# Altium PCB DEVEFX000001A.PcbDoc (part 1 of 3)
Units mm, origin at the board's own origin, x right, y up, seen from the top; angles counter-clockwise.
Board outline 90 x 103.5 mm, 6 copper layers (Top Layer, IN1, IN2, IN3, IN4, Bottom Layer), stack 1.072 mm thick; 156 components, 261 nets, 794 pads, 332 vias.
Unrouted connection lines stored in the file: 137.
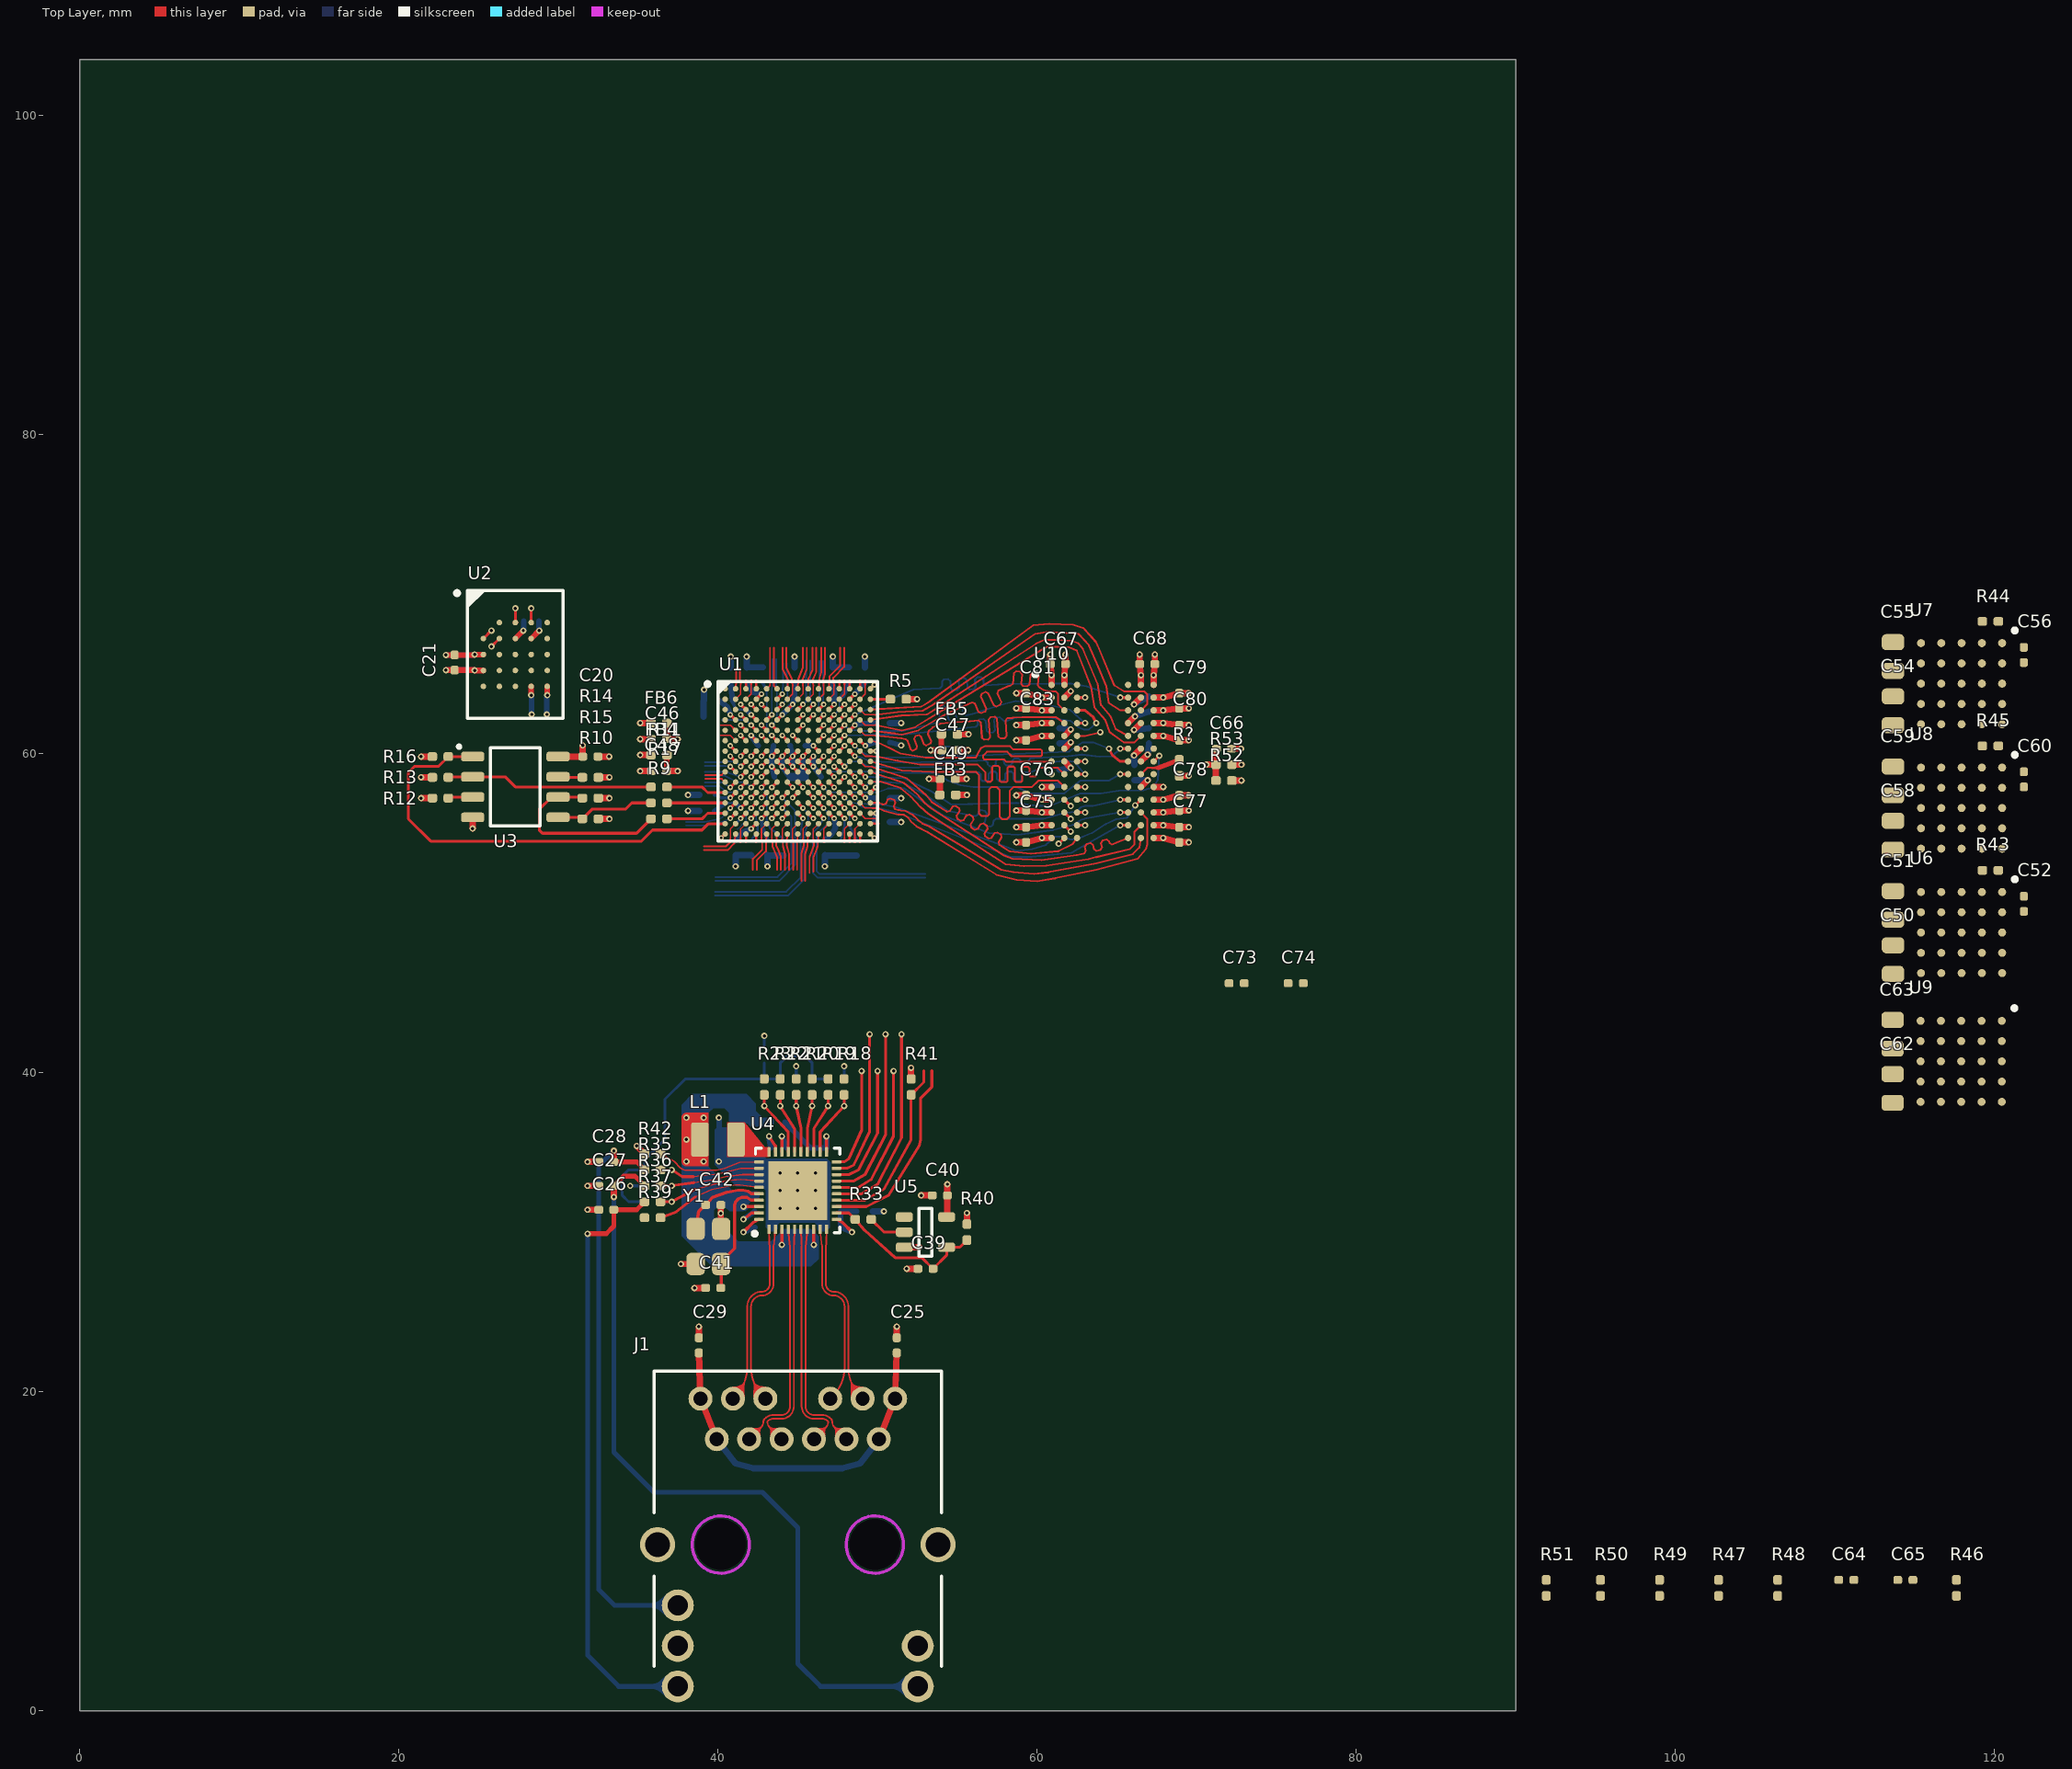
[diagram p0: Top Layer view]
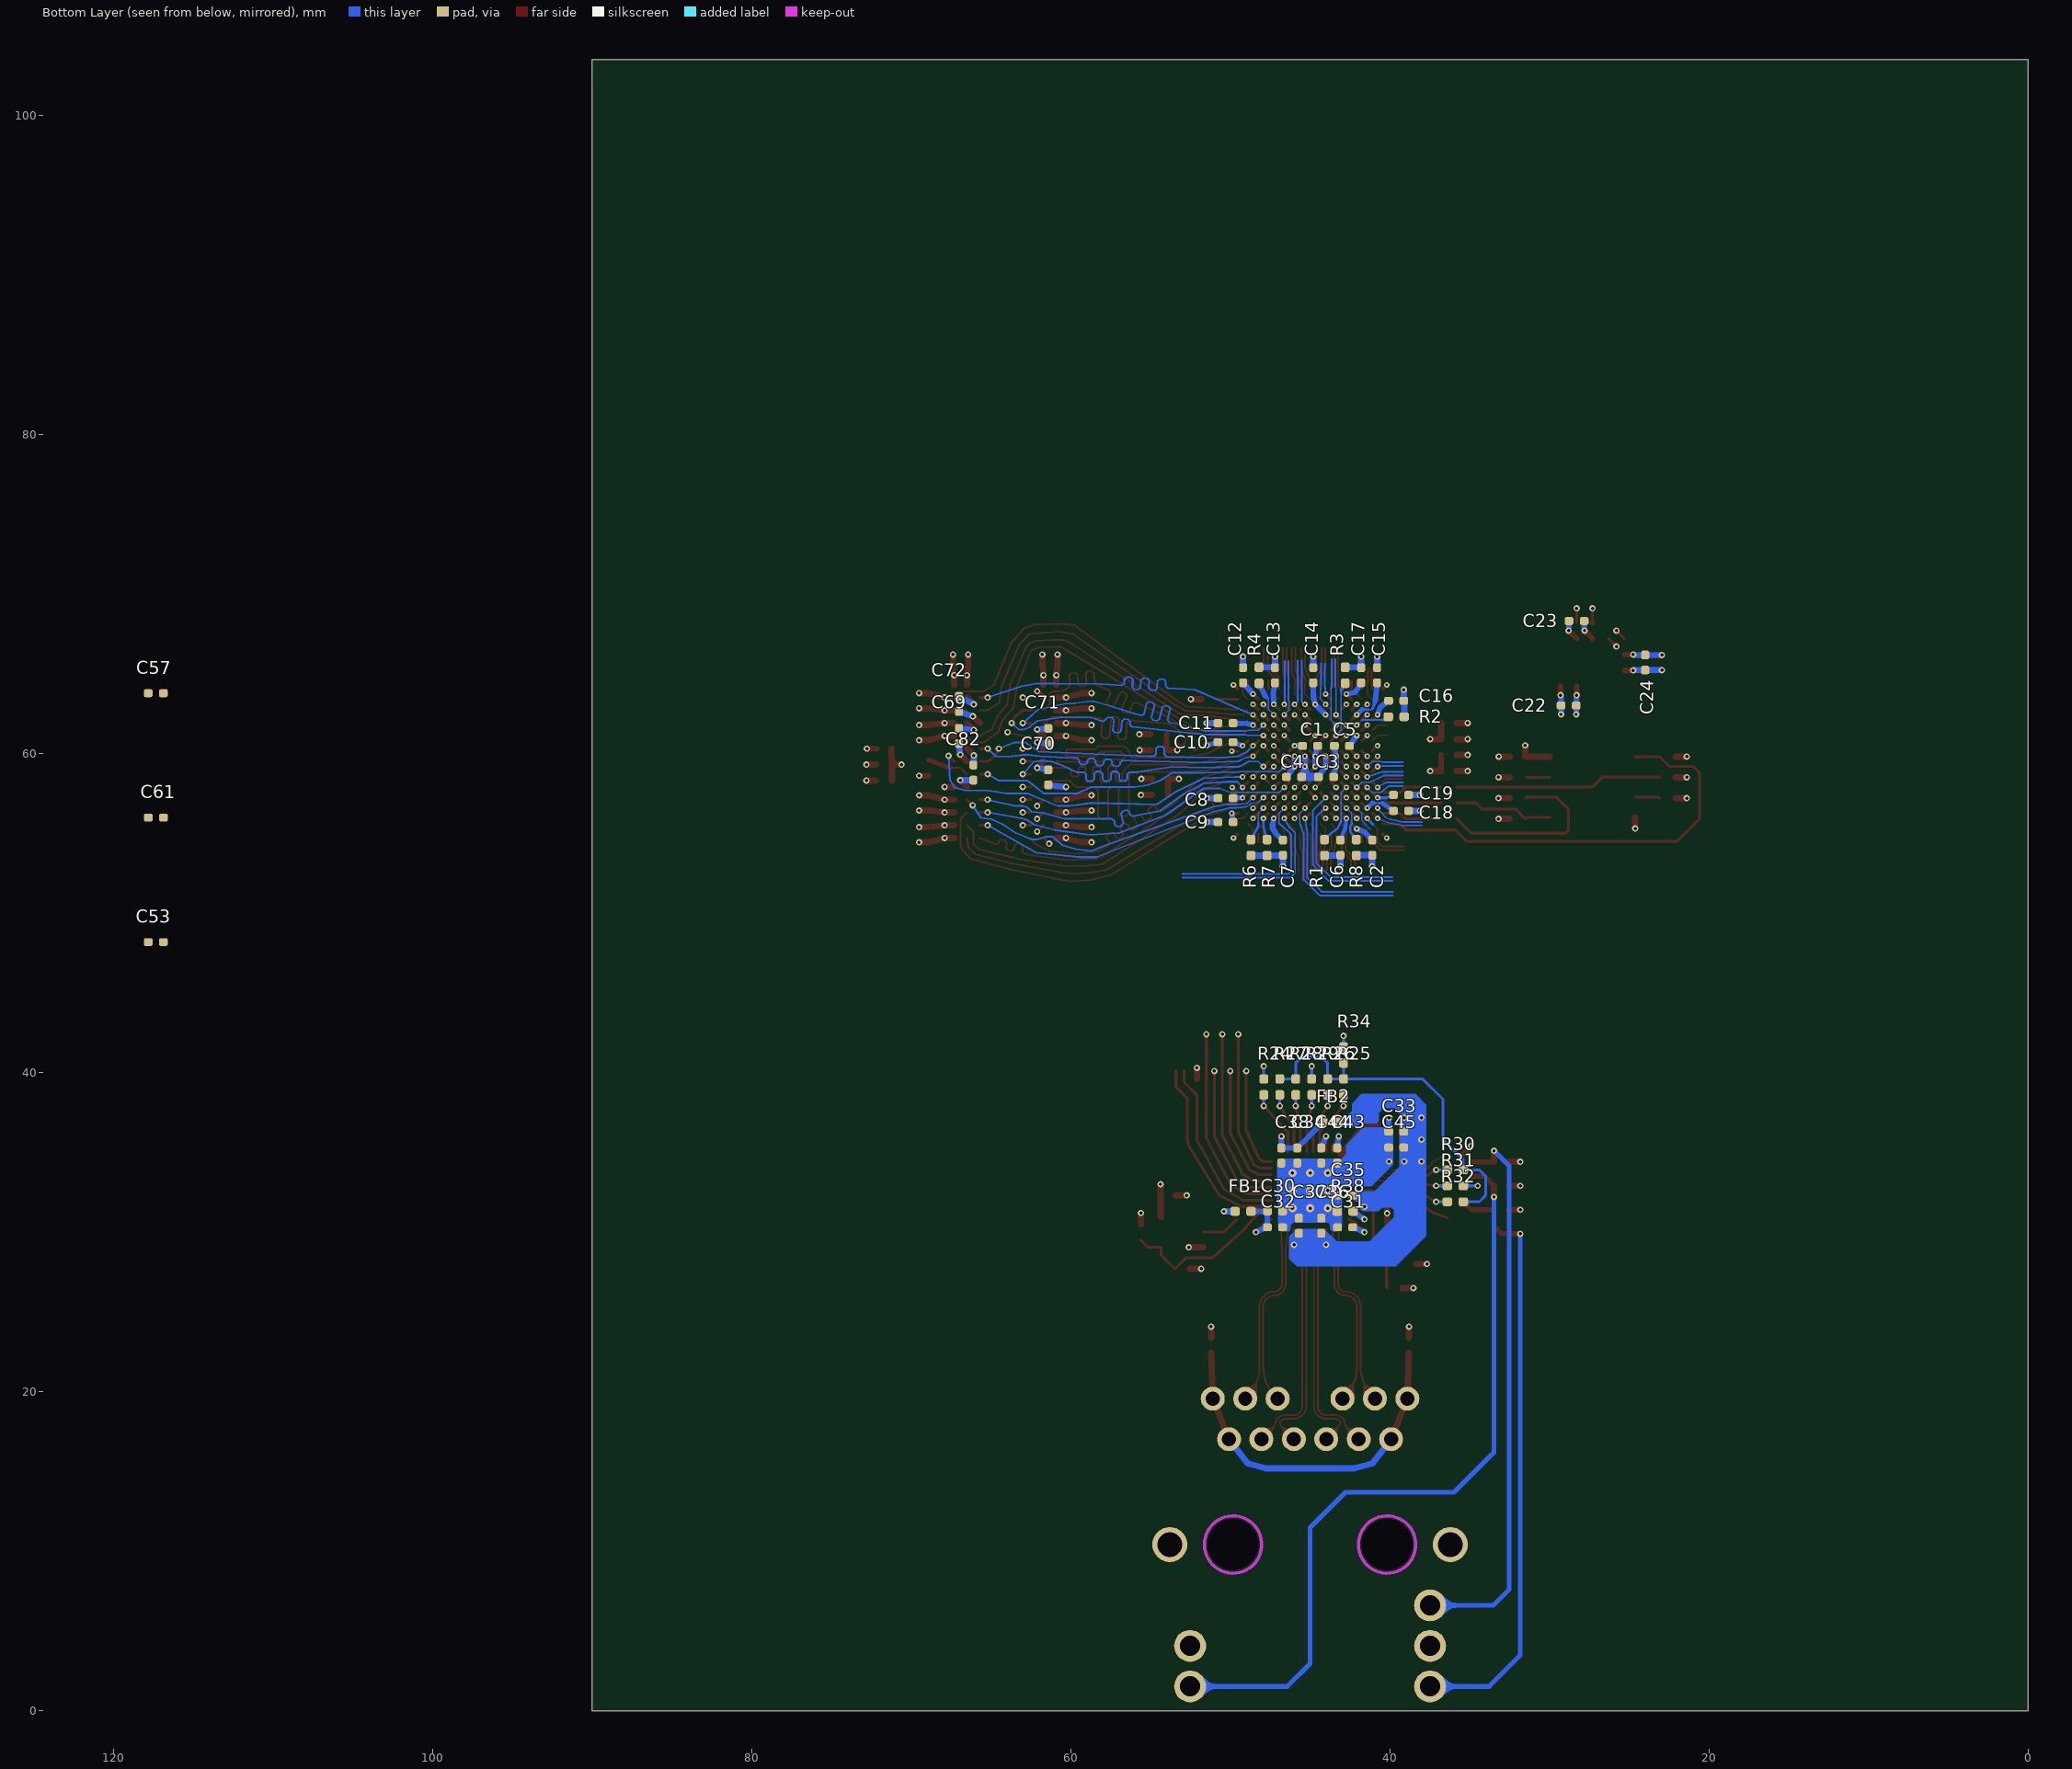
[diagram p1: Bottom Layer view, seen from below]
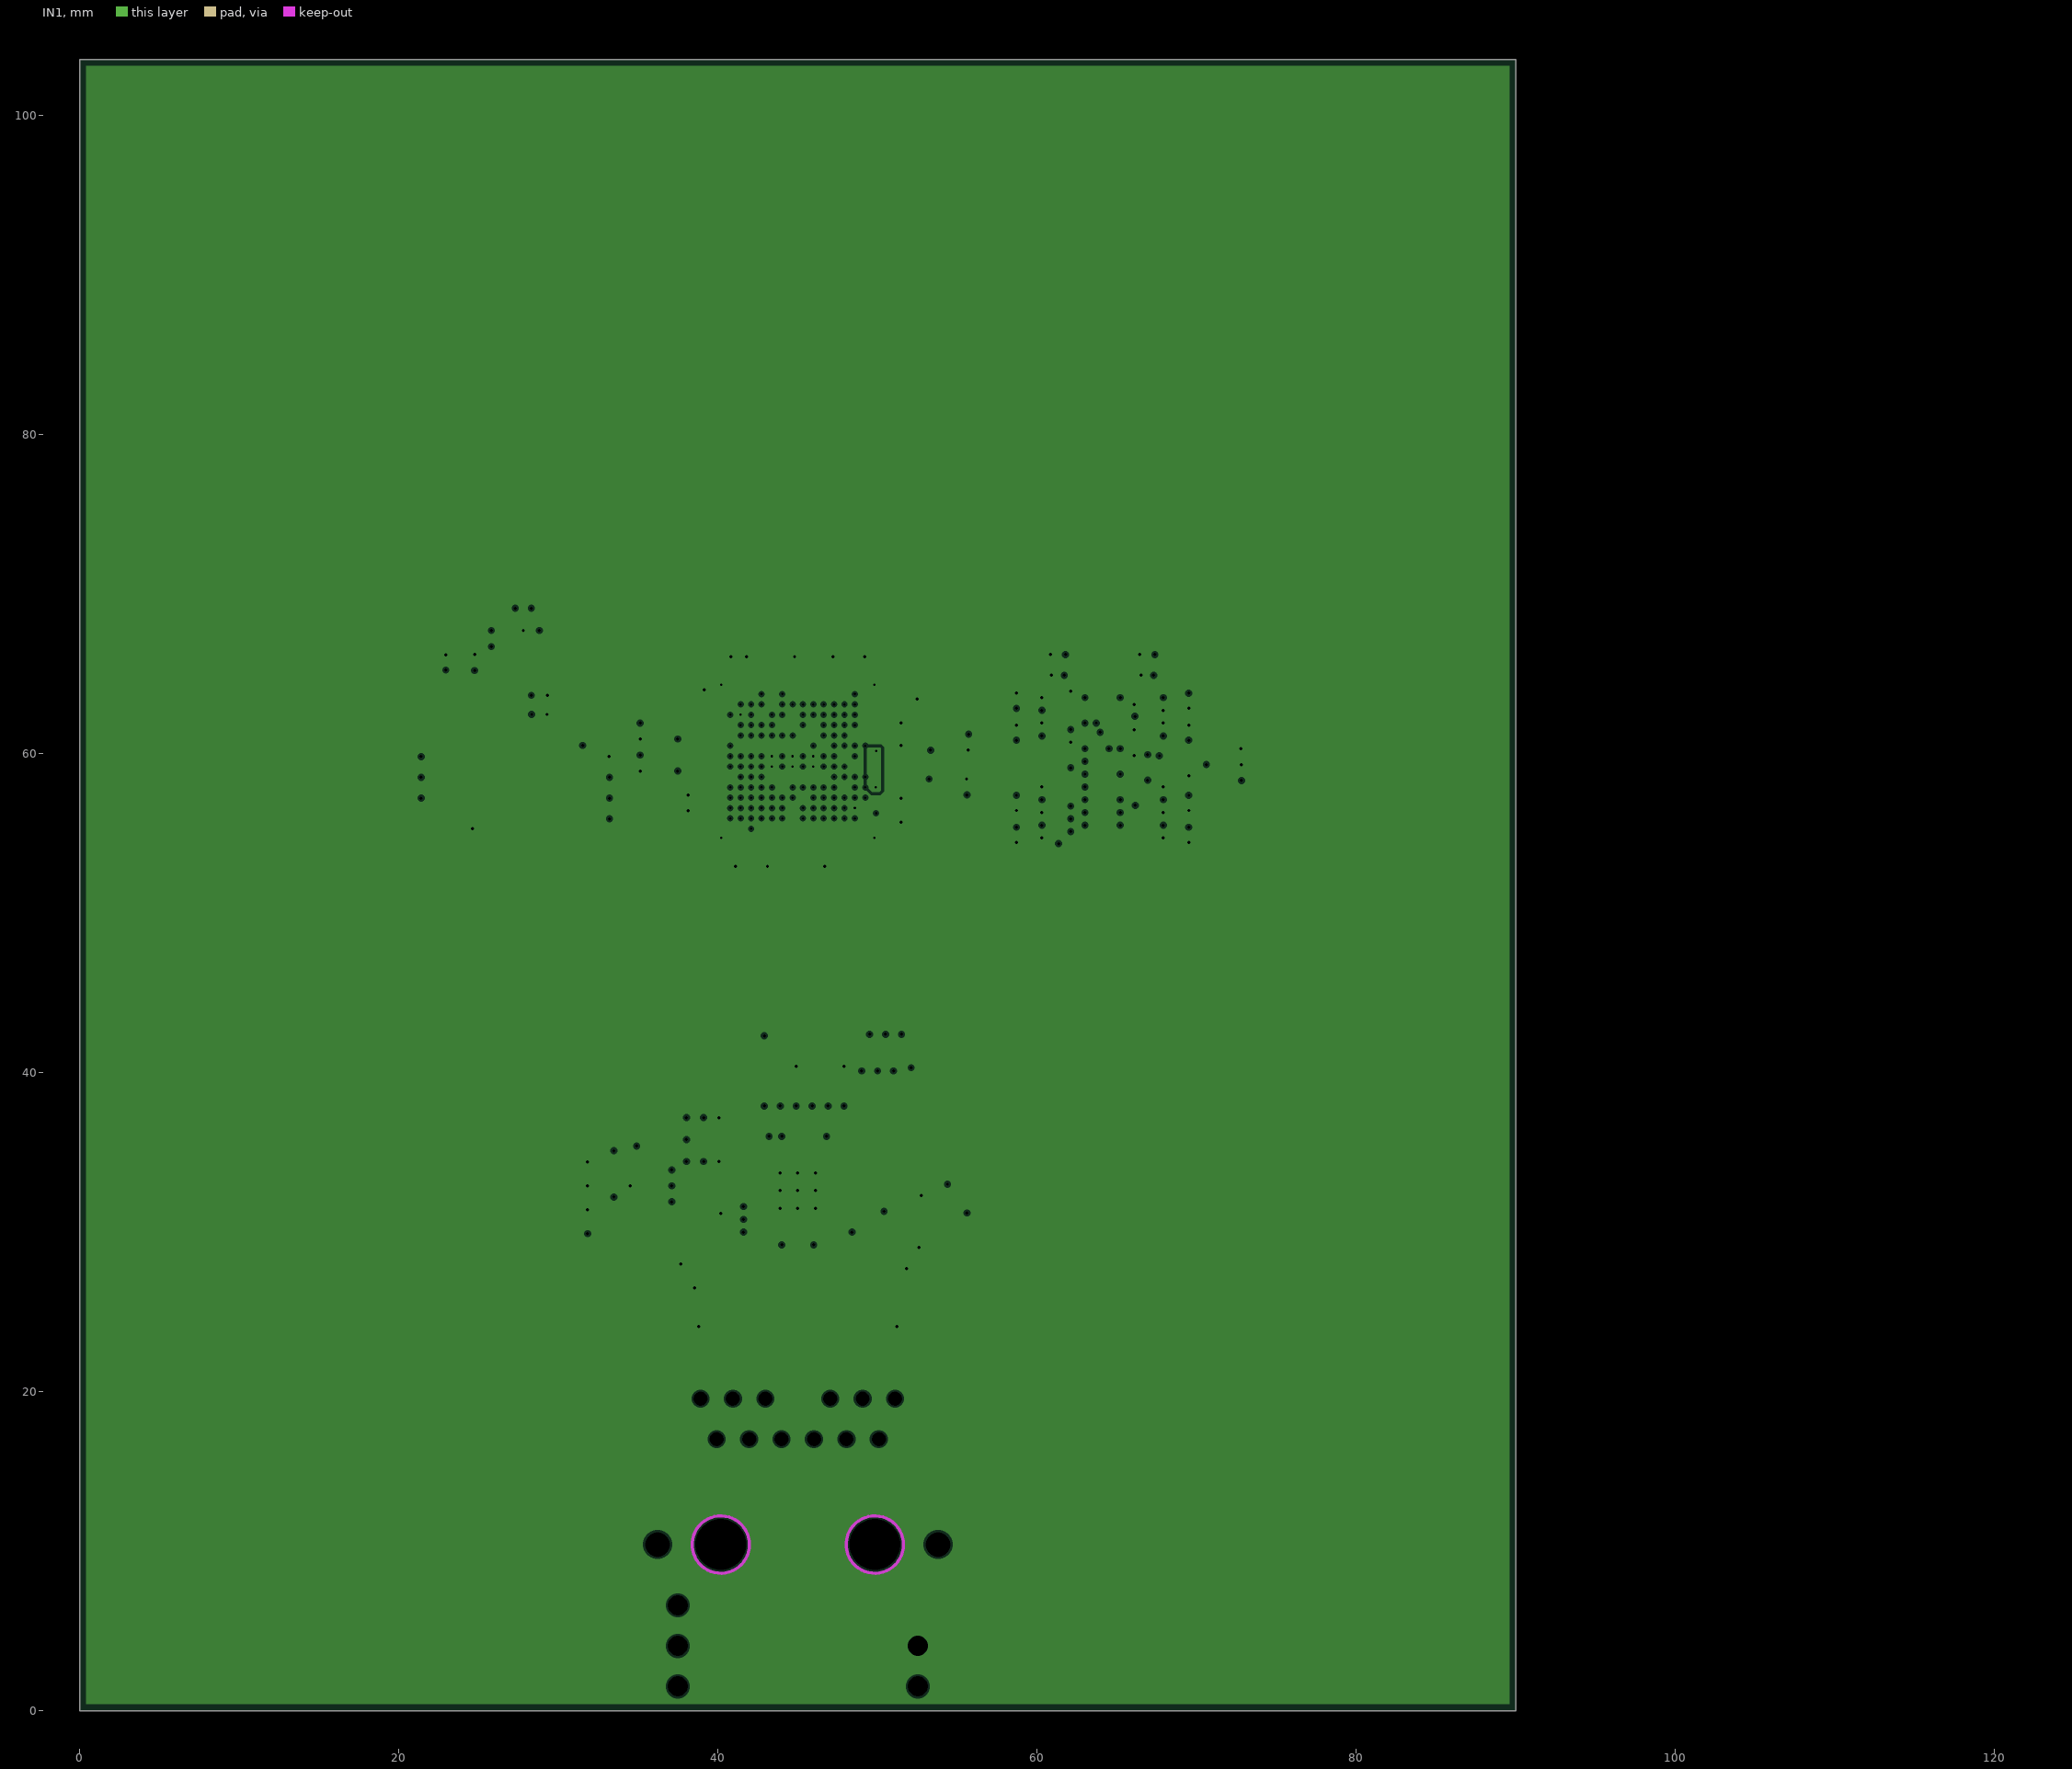
[diagram p2: IN1, clearances drawn from the general rule]
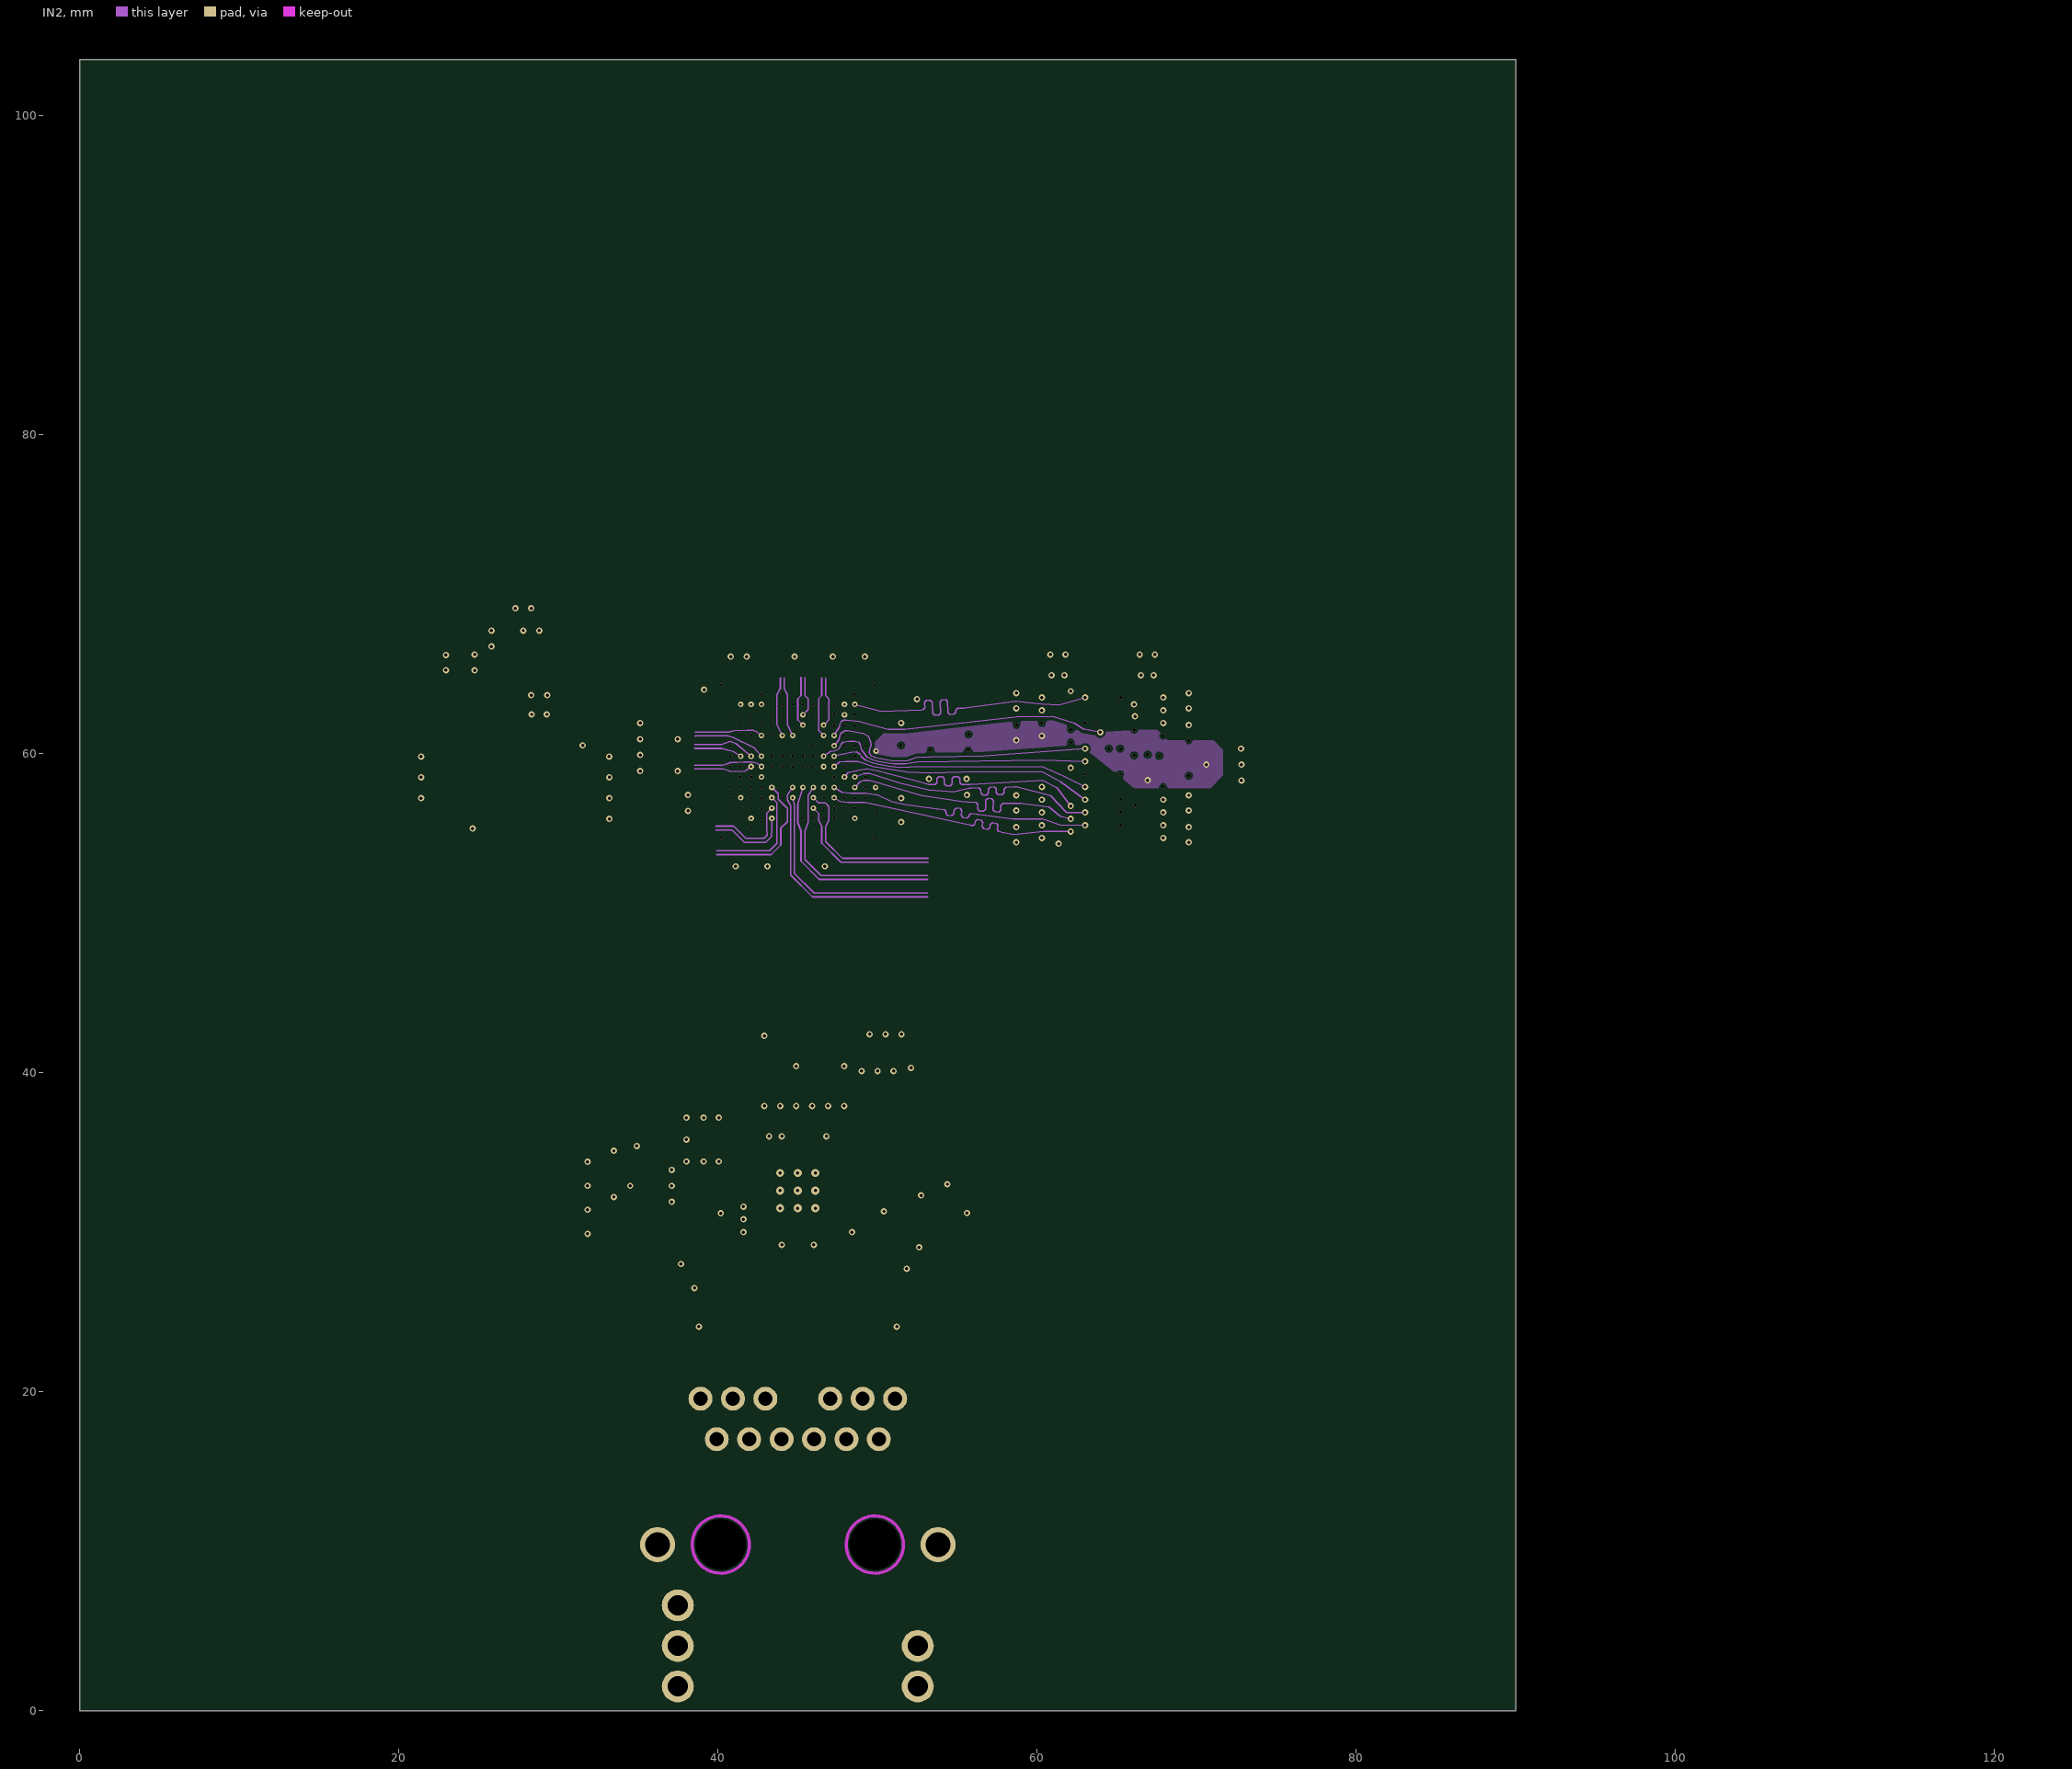
[diagram p3: IN2]
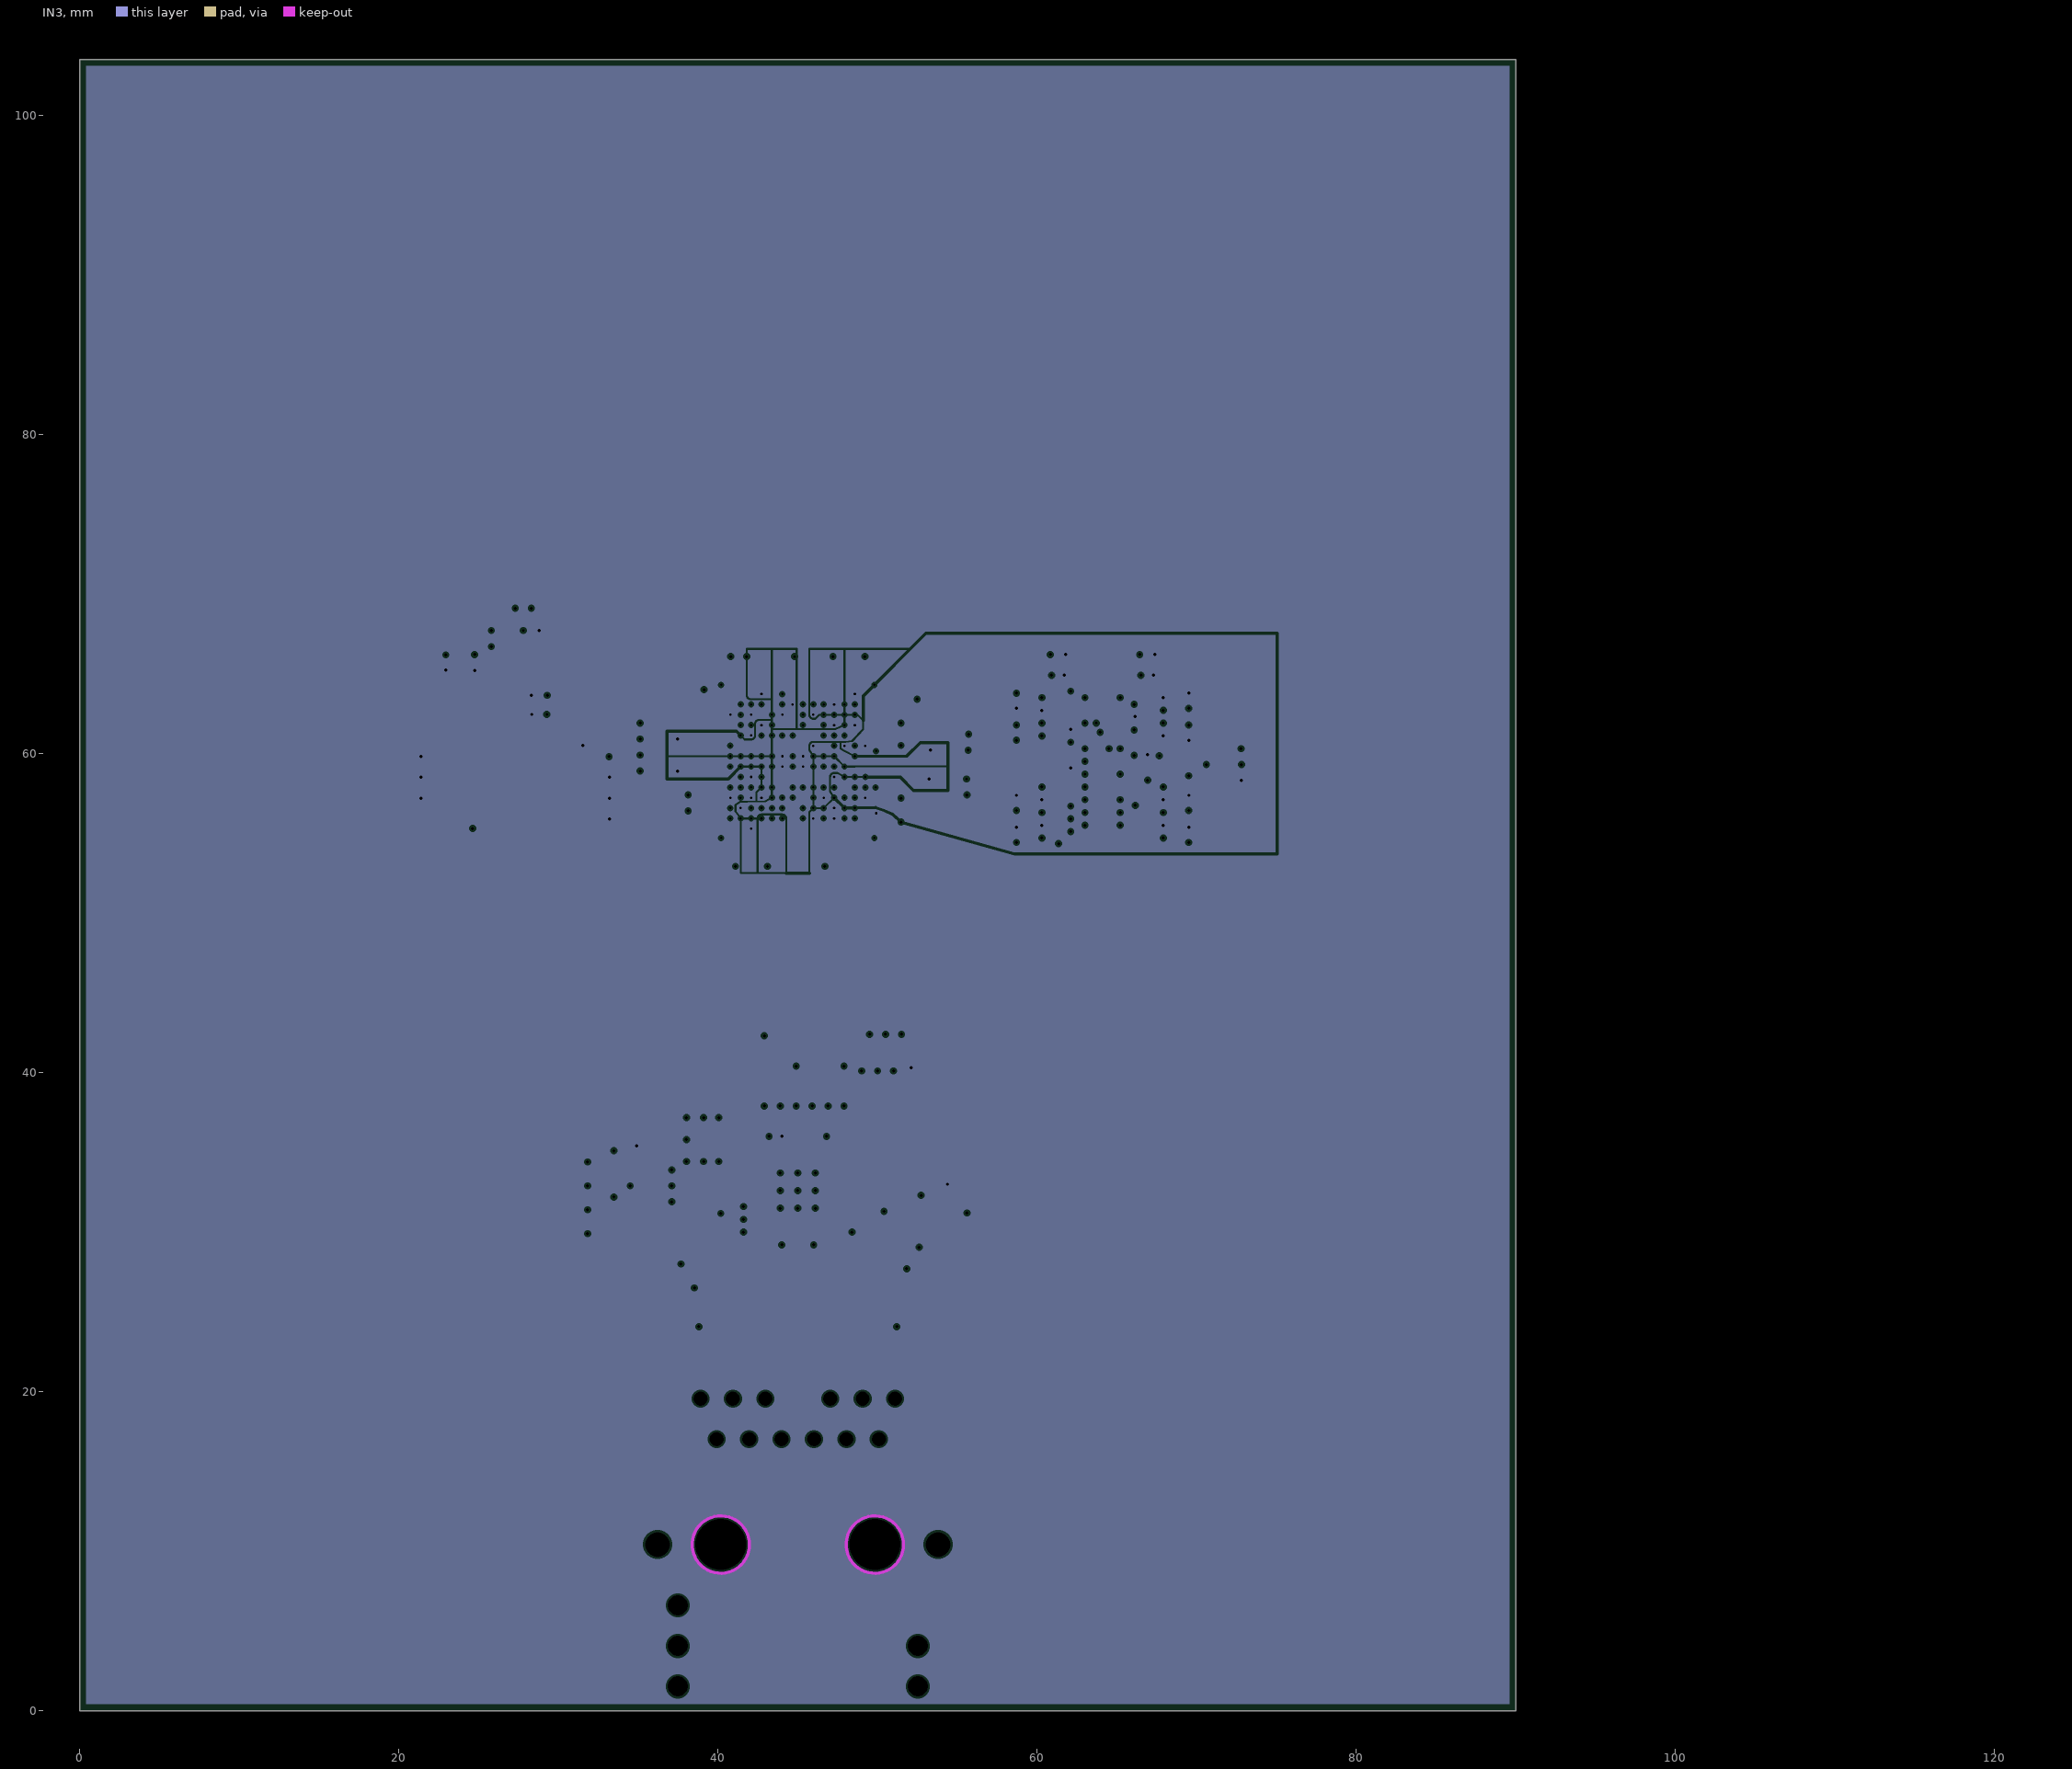
[diagram p4: IN3, clearances drawn from the general rule]
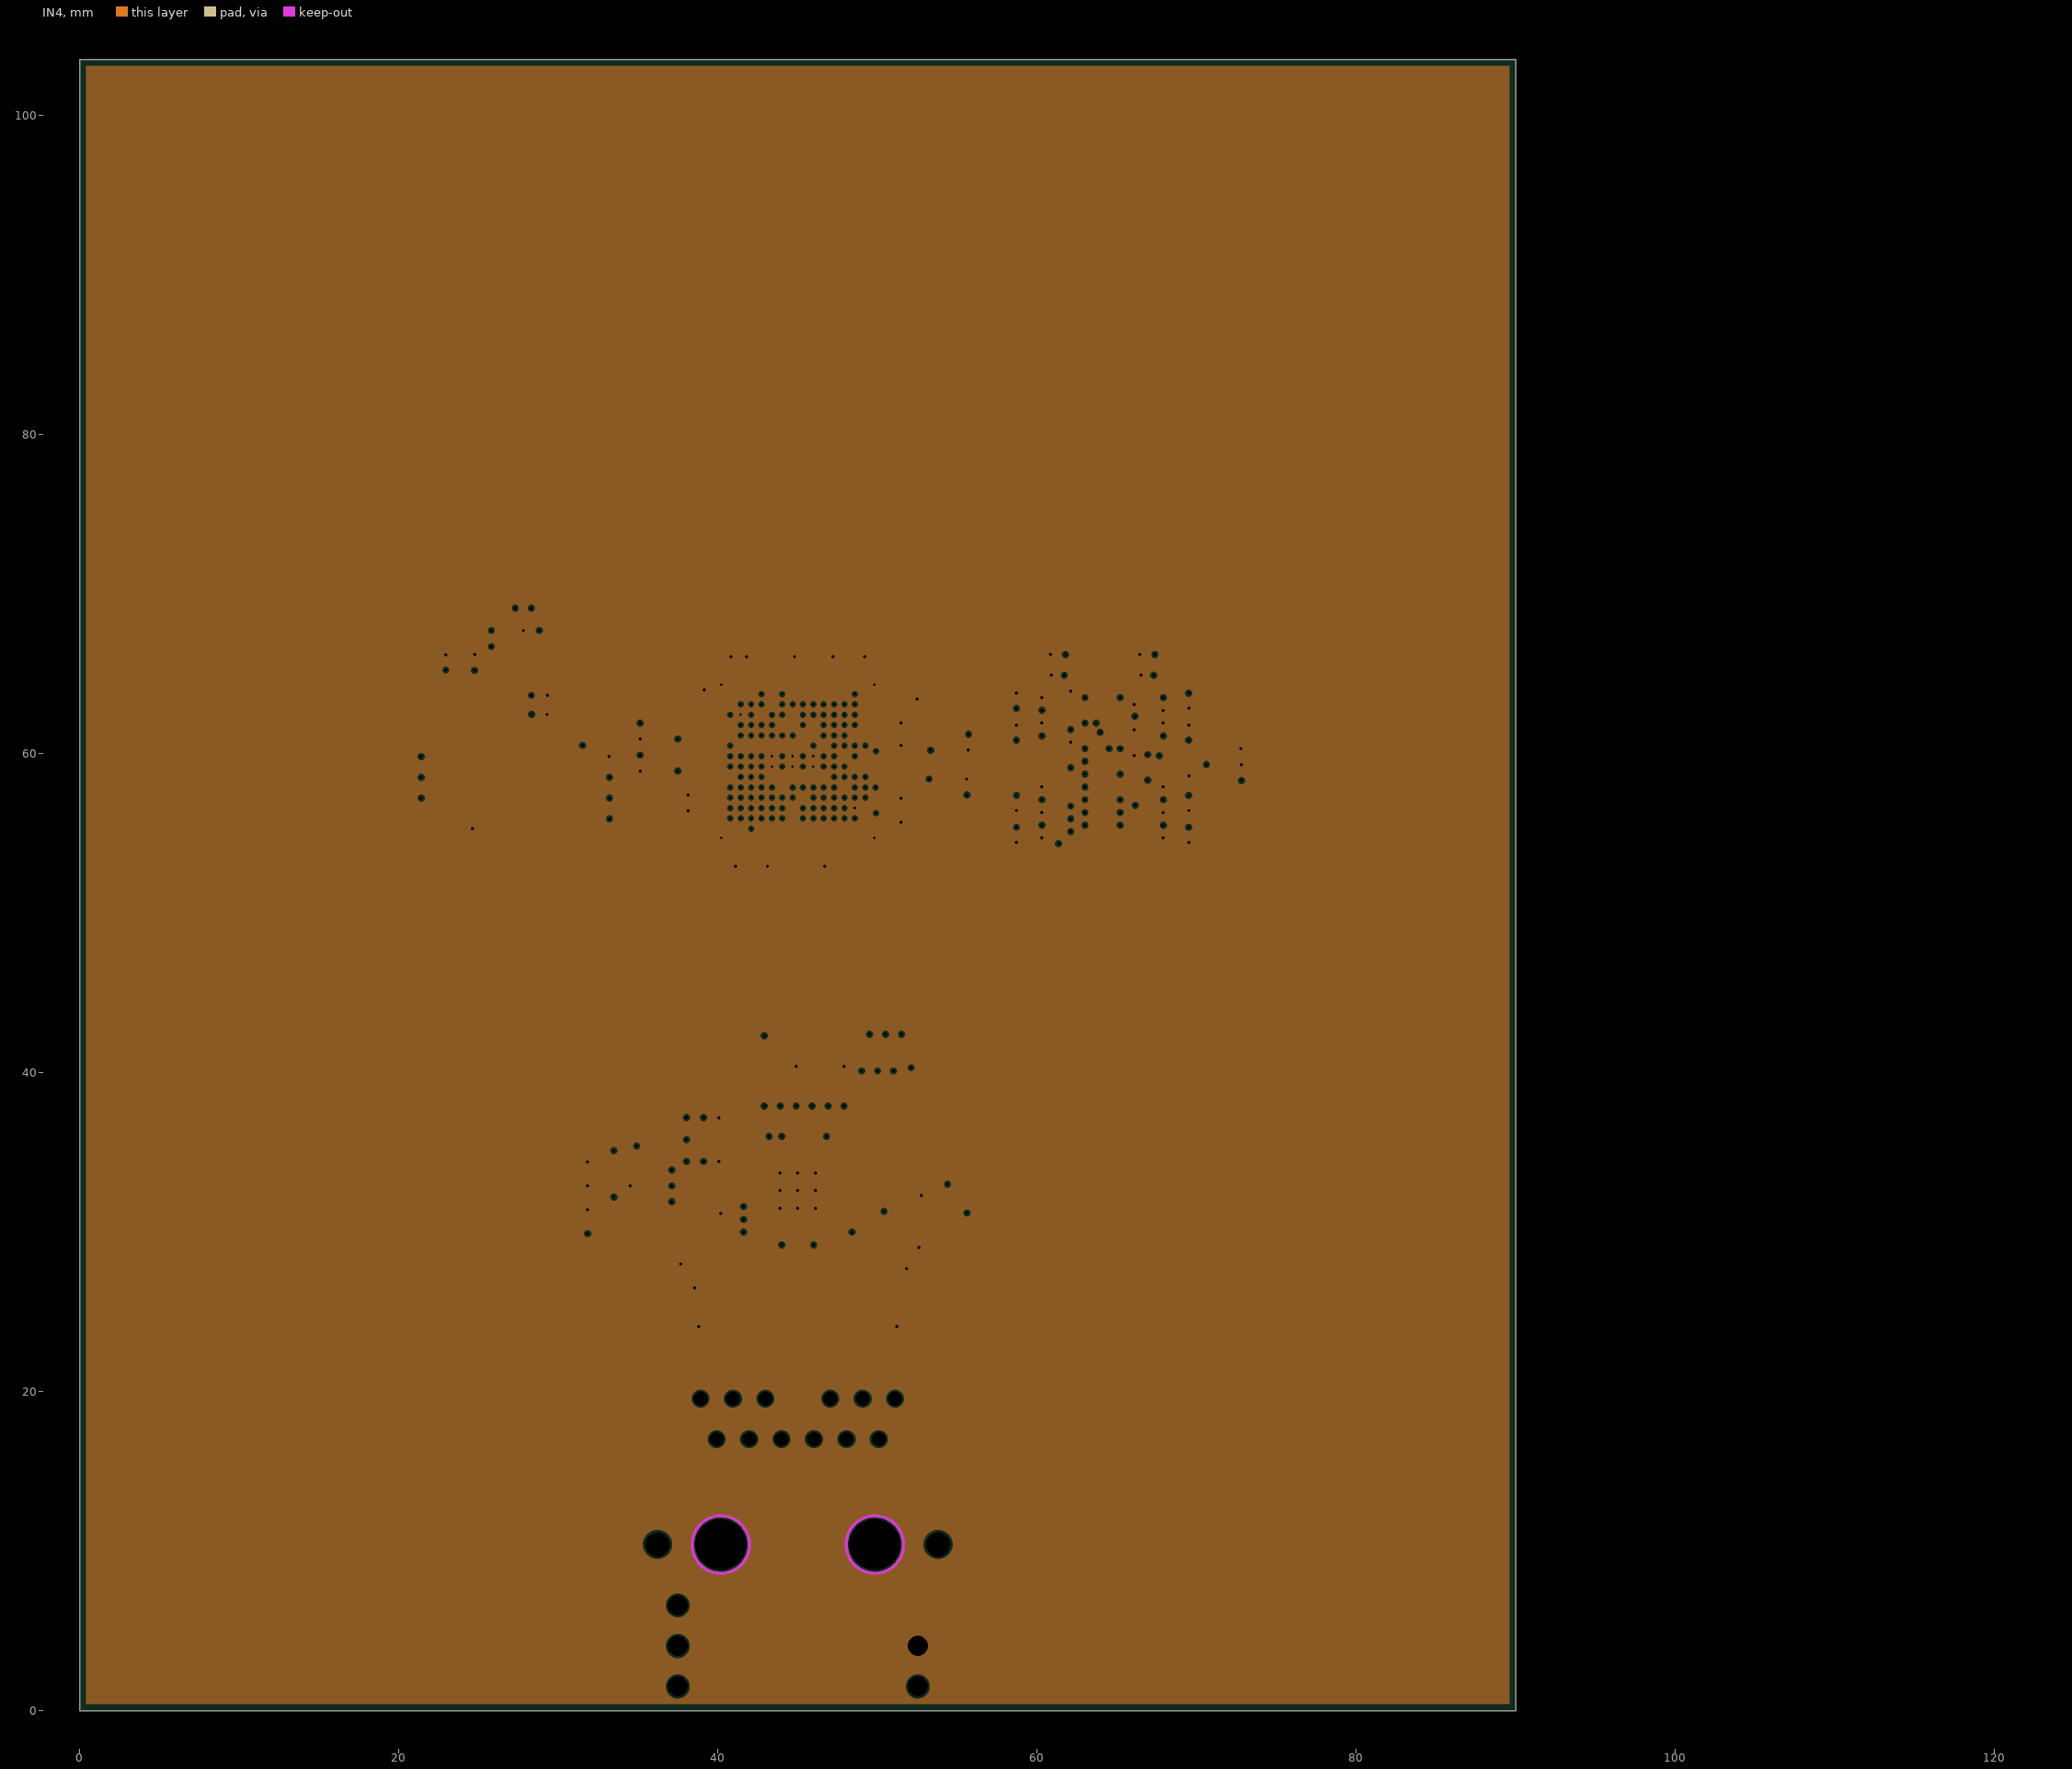
[diagram p5: IN4, clearances drawn from the general rule]

## Layer stack, top to bottom
Top Solder: solder mask 0.025, Dk 4
Top Layer: signal copper 0.035
Dielectric 1: prepreg 0.11, 2116, Dk 4.3
IN1: plane copper 0.018, net (Multiple Nets)
Dielectric 2: core 0.3, FR4, Dk 4.3
IN2: signal copper 0.018
Dielectric 3: prepreg 0.11, 2116, Dk 4.3
IN3: plane copper 0.018, net (Multiple Nets)
Dielectric 4: core 0.3, FR4, Dk 4.3
IN4: plane copper 0.018, net GND
Dielectric 5: prepreg 0.11, 2116, Dk 4.3
Bottom Layer: signal copper 0.035
Bottom Solder: solder mask 0.025, Dk 4

## Board outline
0,0 90,0 90,103.5 0,103.5

## Design rules (kind name [scope] priority, off if disabled: settings)
Clearance Clearance_DDR3_VREF [InNamedPolygon('P0V75_DDR3_VREF_L03_P000')] p1: gap=0.15 ignorepadtopadclearanceinfootprint=FALSE except(0.2: Arc-Track Track-Track Track-SMDPad Track-THPad Track-Via Track-Fill Track-Poly Track-Region Track-Text Track-Hole)
Clearance [All] p2: gap=0.08 ignorepadtopadclearanceinfootprint=FALSE
DiffPairsRouting [All] p1: maxlimit=1 minlimit=0.08 mostfreqgap=0.15 toplayer_prefgap=0.127 toplayer_minwidth=0.08 toplayer_maxwidth=0.4 toplayer_prefwidth=0.111 midlayer1_minwidth=0.08 midlayer1_maxwidth=0.4 midlayer1_prefwidth=0.094 bottomlayer_prefgap=0.127 bottomlayer_minwidth=0.08 bottomlayer_maxwidth=0.4 bottomlayer_prefwidth=0.111 impedanceprofiledriven=TRUE impedanceprofileid={F1F27C7D-6111-4BD9-986E-5BD5284A0AB5} impedanceprofilevalue=100.000000 maxuncoupledlength=15
HoleSize [All] p1: absolutevalues=TRUE maxlimit=6.3 minlimit=0.15 maxpercent=80.000 minpercent=20.000
HoleToHoleClearance [All] p1: gap=0.28 allowstackedmicrovias=TRUE
MatchedLengths DDR3_CLOCKS [InxSignalClass('DDR3_CLK')] p1: tolerance=25.4 checknetsindiffpair=FALSE checkdiffpairvsdiffpair=TRUE checkxsignals=TRUE checkothers=TRUE usedelayunits=TRUE delaytolerance=75.000000
MatchedLengths DDR3_CK [InNetClass('DDR3_CK')] p2: tolerance=25.4 checknetsindiffpair=FALSE checkdiffpairvsdiffpair=TRUE checkxsignals=TRUE checkothers=TRUE usedelayunits=TRUE delaytolerance=1.000000
MatchedLengths DDR3_CA [InxSignalClass('DDR3_CA')] p3: tolerance=25.4 checknetsindiffpair=FALSE checkdiffpairvsdiffpair=TRUE checkxsignals=TRUE checkothers=TRUE usedelayunits=TRUE delaytolerance=20.000000
MatchedLengths DDR3_DQS [InNetClass('DDR3_DQS')] p4: tolerance=25.4 checknetsindiffpair=FALSE checkdiffpairvsdiffpair=TRUE checkxsignals=TRUE checkothers=TRUE usedelayunits=TRUE delaytolerance=1.000000
MatchedLengths DDR3_DQ [InxSignalClass('DDR3_DQ')] p5: tolerance=25.4 checknetsindiffpair=FALSE checkdiffpairvsdiffpair=TRUE checkxsignals=TRUE checkothers=TRUE usedelayunits=TRUE delaytolerance=20.000000
MatchedLengths DP_STATIC_SKEW [InDifferentialPairClass('All Differential Pairs')] p6: tolerance=25.4 checknetsindiffpair=TRUE checkdiffpairvsdiffpair=FALSE checkxsignals=FALSE checkothers=FALSE usedelayunits=TRUE delaytolerance=10.000000
MinimumSolderMaskSliver [All] p1: minsoldermaskwidth=0.12
PlaneClearance [All] p1: clearance=0.125
PlaneConnect [All] p1: pad.planeconnectstyle=Relief pad.reliefexpansion=0.5 pad.reliefentries=4 pad.reliefconductorwidth=0.25 pad.reliefairgap=0.25 via.planeconnectstyle=Direct via.reliefexpansion=0.508 via.reliefentries=4 via.reliefconductorwidth=0.254 via.reliefairgap=0.254
PolygonConnect [All] p1: connectstyle=Direct reliefconductorwidth=0.254 reliefentries=4 polygonreliefangle="90 Angle" airgapwidth=0.25
RoutingVias [All] p1: holewidth=0.3 width=0.6 viastyle="Through Hole" minholewidth=0.15 minwidth=0.35 maxholewidth=6.3 maxwidth=10
SilkToSilkClearance [All] p1: silktosilkclearance=0.1
SilkToSolderMaskClearance [IsPad] p1: minsilkscreentomaskgap=0.15 clearancetoexposedcopper=TRUE
SolderMaskExpansion [All] p1: expansion=0.05 istentingtop=FALSE
Width [All] p1: maxlimit=2 minlimit=0.08 preferedwidth=0.2
22 further rules are at their usual default settings.

## Classes and differential pairs
net class DDR3_DQ: DDR3_DM DDR3_DQ0 DDR3_DQ1 DDR3_DQ2 DDR3_DQ3 DDR3_DQ4 DDR3_DQ5 DDR3_DQ6 DDR3_DQ7 DDR3_DQS_C DDR3_DQS_T
net class DDR3_DQS: DDR3_CK_C DDR3_CK_T DDR3_DQS_C DDR3_DQS_T
net class DDR3_CLK: DDR3_CK_C DDR3_CK_T DDR3_DQS_C DDR3_DQS_T
net class DDR3_CK: DDR3_CK_C DDR3_CK_T DDR3_DQS_C DDR3_DQS_T
net class DDR3_CA: DDR3_A0 DDR3_A1 DDR3_A2 DDR3_A3 DDR3_A4 DDR3_A5 DDR3_A6 DDR3_A7 DDR3_A8 DDR3_A9 DDR3_A10 DDR3_A11 DDR3_A12 DDR3_A13 DDR3_A14 DDR3_BA0 DDR3_BA1 DDR3_BA2 DDR3_CAS_N DDR3_CK_C DDR3_CK_T DDR3_CKE DDR3_CS_N DDR3_ODT DDR3_RAS_N DDR3_WE_N
component class 12_MEM_DDR3: C66 C67 C68 C69 C70 C71 C72 C73 C74 C75 C76 C77 C78 C79 C80 C81 C82 C83 R52 R53 R? U10
net class PLL_TR: B2B_DP7_P
net class PLL_TL: B1B_DP9_P B2A_DP0_P
net class PLL_BR: B4A_DP7_P
net class PLL_BL: B1A_DP0_P B4B_DP0_P
component class 19_PWR_VRS: C50 C51 C52 C53 C54 C55 C56 C57 C58 C59 C60 C61 C62 C63 C64 C65 R43 R44 R45 R46 R47 R48 R49 R50 R51 U6 U7 U8 U9
differential pair class 100D: ETH_MDI0 ETH_MDI1 ETH_MDI2 ETH_MDI3
net class MDI: ETH_MDI0_N ETH_MDI0_P ETH_MDI1_N ETH_MDI1_P ETH_MDI2_N ETH_MDI2_P ETH_MDI3_N ETH_MDI3_P
component class 13_IO_ETH: C25 C26 C27 C28 C29 C30 C31 C32 C33 C34 C35 C36 C37 C38 C39 C40 C41 C42 C43 C44 C45 FB1 FB2 J1 L1 R18 R19 R20 R21 R22 R23 R24 R25 R26 R27 R28 R29 R30 R31 R32 R33 R34 R35 R36 R37 R38 R39 R40 R41 R42 U4 U5 Y1
component class 11_MEM_HYPERRAM_FLASH: C20 C21 C22 C23 C24 R10 R12 R13 R14 R15 R16 U2 U3
component class 09_FPGA_HSIO_B4: R7 R8
component class 08_FPGA_HSIO_B3: R5 R6
component class 07_FPGA_HSIO_B2: R3 R4
component class 06_FPGA_HSIO_B1: R1 R2 R9 R11 R17
net class HVIO: BL_GPIOL_01 BL_GPIOL_02 BL_TCK BL_TDI BL_TDO BL_TMS BR_GPIOR_21 BR_GPIOR_22 BR_GPIOR_24 BR_GPIOR_25 BR_GPIOR_27 BR_GPIOR_28 BR_GPIOR_29 TL_GPIO_03 TL_GPIO_04 TL_GPIO_06 TL_GPIO_07 TL_GPIO_09 TL_GPIO_10 TL_GPIO_11 TR_GPIOR_12 TR_GPIOR_13 TR_GPIOR_15 TR_GPIOR_16 TR_GPIOR_18 TR_GPIOR_19 TR_GPIOR_20
component class 10_FPGA_PWR: C1 C2 C3 C4 C5 C6 C7 C8 C9 C10 C11 C12 C13 C14 C15 C16 C17 C18 C19 C46 C47 C48 C49 FB3 FB4 FB5 FB6
component class 05_FPGA_HVIO: U1
differential pair ETH_MDI3: +ETH_MDI3_P -ETH_MDI3_N
differential pair ETH_MDI2: +ETH_MDI2_P -ETH_MDI2_N
differential pair ETH_MDI1: +ETH_MDI1_P -ETH_MDI1_N
differential pair ETH_MDI0: +ETH_MDI0_P -ETH_MDI0_N

## Components (designator, comment, footprint, x,y, rotation, side; value= is the part's Value field where it differs from the comment)
C1 "10uF" CAPC1005X06N#1 45,60.475 r0 bottom
C2 "10uF" CAPC1005X06N#1 41.1,54.1 r90 bottom
C3 "10uF" CAPC1005X06N#1 44,58.525 r0 bottom
C4 "10uF" CAPC1005X06N#1 46,58.525 r180 bottom
C5 "10uF" CAPC1005X06N#1 43,60.475 r180 bottom
C6 "10uF" CAPC1005X06N#1 43.1,54.1 r90 bottom
C7 "10uF" CAPC1005X06N#1 46.7,54.1 r90 bottom
C8 "10uF" CAPC1005X06N#1 50.3,57.2 r180 bottom
C9 "10uF" CAPC1005X06N#1 50.3,55.7 r180 bottom
C10 "10uF" CAPC1005X06N#1 50.3,60.7 r180 bottom
C11 "10uF" CAPC1005X06N#1 50.3,61.9 r180 bottom
C12 "10uF" CAPC1005X06N#1 49.2,64.9 r270 bottom
C13 "10uF" CAPC1005X06N#1 47.2,64.9 r270 bottom
C14 "10uF" CAPC1005X06N#1 44.8,64.9 r270 bottom
C15 "10uF" CAPC1005X06N#1 40.8,64.9 r270 bottom
C16 "10uF" CAPC1005X06N#1 39.6,63.3 r0 bottom
C17 "10uF" CAPC1005X06N#1 41.8,64.9 r270 bottom
C18 "10uF" CAPC1005X06N#1 39.3,56.4 r0 bottom
C19 "10uF" CAPC1005X06N#1 39.3,57.4 r0 bottom
C20 "10uF" CAPC1005X06N#1 32,59.8 r180 top
C21 "10uF" CAPC1005X06N#1 23.5,65.7 r270 top
C22 "10uF" CAPC1005X06N#1 28.8,63 r180 bottom
C23 "10uF" CAPC1005X06N#1 28.3,68.3 r0 bottom
C24 "10uF" CAPC1005X06N#1 24,65.7 r270 bottom
C25 "0.1uF" CAPC1005X06N#1 51.2,22.9 r270 top
C26 "100pF" CAPC1005X06N#1 33,31.4 r0 top
C27 "100pF" CAPC1005X06N#1 33,32.9 r0 top
C28 "100pF" CAPC1005X06N#1 33,34.4 r0 top
C29 "0.1uF" CAPC1005X06N#1 38.8,22.9 r270 top
C30 "10uF" CAPC1005X06N#2 47.2,31.3 r0 bottom
C31 "0.1uF" CAPC1005X06N#2 42.8,30.3 r180 bottom
C32 "0.1uF" CAPC1005X06N#2 47.2,30.3 r0 bottom
C33 "10uF" CAPC1005X06N#1 39.6,36.3 r180 bottom
C34 "10uF" CAPC1005X06N#2 45.8,34.8 r90 bottom
C35 "0.1uF" CAPC1005X06N#2 42.8,32.3 r180 bottom
C36 "0.1uF" CAPC1005X06N#2 44.3,30.4 r270 bottom
C37 "0.1uF" CAPC1005X06N#2 45.7,30.4 r270 bottom
C38 "0.1uF" CAPC1005X06N#2 46.8,34.8 r90 bottom
C39 "10uF" CAPC1005X06N#1 53,27.7 r0 top
C40 "0.1uF" CAPC1005X06N#1 53.9,32.3 r0 top
C41 "27pF" CAPC1005X06N#1 39.7,26.5 r0 top
C42 "27pF" CAPC1005X06N#1 39.7,31.7 r180 top
C43 "10uF" CAPC1005X06N#1 43.3,34.8 r90 bottom
C44 "10uF" CAPC1005X06N#2 44.3,34.8 r90 bottom
C45 "10uF" CAPC1005X06N#1 39.6,35.3 r180 bottom
C46 "10uF" CAPC1005X06N#1 36.3,60.9 r0 top
C47 "10uF" CAPC1005X06N#1 54.5,60.2 r180 top
C48 "10uF" CAPC1005X06N#1 36.3,58.9 r0 top
C49 "10uF" CAPC1005X06N#1 54.4,58.4 r180 top
C50 "22uF" CAPC2012X14N 113.625,47.075 r270 top
C51 "47uF" CAPC2012X14N 113.625,50.475 r90 top
C52 "0.1uF" CAPC1005X06N#1 121.825,50.575 r270 top
C53 "10uF" CAPC1005X06N#1 117.325,48.175 r180 bottom
C54 "22uF" CAPC2012X14N 113.625,62.675 r270 top
C55 "47uF" CAPC2012X14N 113.625,66.075 r90 top
C56 "0.1uF" CAPC1005X06N#1 121.825,66.175 r270 top
C57 "10uF" CAPC1005X06N#1 117.325,63.775 r180 bottom
C58 "22uF" CAPC2012X14N 113.625,54.875 r270 top
C59 "47uF" CAPC2012X14N 113.625,58.275 r90 top
C60 "0.1uF" CAPC1005X06N#1 121.825,58.375 r270 top
C61 "10uF" CAPC1005X06N#1 117.325,55.975 r180 bottom
C62 "22uF" CAPC2012X14N 113.6,39 r270 top
C63 "47uF" CAPC2012X14N 113.6,42.4 r90 top
C64 "0.1uF" CAPC1005X06N#1 110.7,8.2 r180 top
C65 "10uF" CAPC1005X06N#1 114.4,8.2 r180 top
C66 "10uF" CAPC1005X06N#1 71.7,60.3 r180 top
C67 "10uF" CAPC1005X06N#1 61.3,65.6 r0 top
C68 "10uF" CAPC1005X06N#1 66.9,65.6 r0 top
C69 "10uF" CAPC1005X06N#1 67,61.1 r270 bottom
C70 "10uF" CAPC1005X06N#1 61.4,58.5 r90 bottom
C71 "10uF" CAPC1005X06N#1 61.4,61.1 r90 bottom
C72 "10uF" CAPC1005X06N#1 67,63.1 r270 bottom
C73 "10uF" CAPC1005X06N#1 72.5,45.6 r180 top
C74 "10uF" CAPC1005X06N#1 76.2,45.6 r180 top
C75 "10uF" CAPC1005X06N#1 59.3,54.9 r90 top
C76 "10uF" CAPC1005X06N#1 59.3,56.9 r90 top
C77 "10uF" CAPC1005X06N#1 68.9,54.9 r90 top
C78 "10uF" CAPC1005X06N#1 68.9,56.9 r90 top
C79 "10uF" CAPC1005X06N#1 68.9,63.3 r90 top
C80 "10uF" CAPC1005X06N#1 68.9,61.3 r270 top
C81 "10uF" CAPC1005X06N#1 59.3,63.3 r270 top
C82 "10uF" CAPC1005X06N#1 66.1,58.8 r270 bottom
C83 "10uF" CAPC1005X06N#1 59.3,61.3 r270 top
FB1 "120 Ohms @ 100 MHz" INDC1005X05N#1 49.2,31.3 r180 bottom
FB2 "120 Ohms @ 100 MHz" INDC1005X05N#1 43.7,36.9 r0 bottom
FB3 "120 Ohms @ 100 MHz" INDC1005X05N#2 54.4,57.4 r180 top
FB4 "120 Ohms @ 100 MHz" INDC1005X05N#2 36.3,59.9 r0 top
FB5 "120 Ohms @ 100 MHz" INDC1005X05N#2 54.5,61.2 r180 top
FB6 "120 Ohms @ 100 MHz" INDC1005X05N#2 36.3,61.9 r0 top
J1 "J0G-0003NL" PULSE_J0G-0003NL 45,9.4 r180 top
L1 "2.2uH" INDC2520X12N 40,35.8 r180 top
R1 "10k" RESC1005X03N#1 44.1,54.1 r270 bottom
R2 "10k" RESC1005X03N#1 39.6,62.3 r180 bottom
R3 "10k" RESC1005X03N#1 42.8,64.9 r90 bottom
R4 "10k" RESC1005X03N#1 48.2,64.9 r90 bottom
R5 "10k" RESC1005X03N#1 51.3,63.4 r0 top
R6 "10k" RESC1005X03N#1 48.7,54.1 r270 bottom
R7 "10k" RESC1005X03N#1 47.7,54.1 r270 bottom
R8 "10k" RESC1005X03N#1 42.1,54.1 r270 bottom
R9 "33" RESC1005X03N#1 36.3,55.9 r0 top
R10 "47k" RESC1005X03N#1 32,55.9 r0 top
R11 "33" RESC1005X03N#1 36.3,57.9 r0 top
R12 "1k" RESC1005X03N#1 22.6,57.2 r0 top
R13 "47k" RESC1005X03N#1 22.6,58.5 r180 top
R14 "47k" RESC1005X03N#1 32,58.5 r0 top
R15 "47k" RESC1005X03N#1 32,57.2 r0 top
R16 "47k" RESC1005X03N#1 22.6,59.8 r180 top
R17 "33" RESC1005X03N#1 36.3,56.9 r0 top
R18 "33" RESC1005X03N#1 47.9,39.1 r270 top
R19 "33" RESC1005X03N#1 46.9,39.1 r270 top
R20 "33" RESC1005X03N#1 45.9,39.1 r270 top
R21 "33" RESC1005X03N#1 44.9,39.1 r270 top
R22 "33" RESC1005X03N#1 43.9,39.1 r270 top
R23 "33" RESC1005X03N#1 42.9,39.1 r270 top
R24 "4.7k" RESC1005X03N#2 47.9,39.1 r270 bottom
R25 "4.7k" RESC1005X03N#1 42.9,39.1 r270 bottom
R26 "4.7k" RESC1005X03N#2 43.9,39.1 r270 bottom
R27 "4.7k" RESC1005X03N#1 46.9,39.1 r270 bottom
R28 "4.7k" RESC1005X03N#2 45.9,39.1 r270 bottom
R29 "4.7k" RESC1005X03N#1 44.9,39.1 r270 bottom
R30 "4.7k" RESC1005X03N#2 35.9,33.9 r0 bottom
R31 "4.7k" RESC1005X03N#2 35.9,32.9 r0 bottom
R32 "4.7k" RESC1005X03N#2 35.9,31.9 r0 bottom
R33 "33" RESC1005X03N#1 49.1,30.8 r180 top
R34 "0" RESC1005X03N#1 42.9,41.1 r90 bottom
R35 "510" RESC1005X03N#1 35.9,33.9 r180 top
R36 "510" RESC1005X03N#1 35.9,32.9 r180 top
R37 "510" RESC1005X03N#1 35.9,31.9 r180 top
R38 "2.49k" RESC1005X03N#2 42.8,31.3 r0 bottom
R39 "33" RESC1005X03N#1 35.9,30.9 r0 top
R40 "4.7k" RESC1005X03N#1 55.6,30 r90 top
R41 "1.5k" RESC1005X03N#1 52.1,39.1 r270 top
R42 "4.7k" RESC1005X03N#1 35.9,34.9 r0 top
R43 "510" RESC1005X03N#1 119.725,52.675 r0 top
R44 "510" RESC1005X03N#1 119.725,68.275 r0 top
R45 "510" RESC1005X03N#1 119.725,60.475 r0 top
R46 "510" RESC1005X03N#1 117.6,7.7 r270 top
R47 "4.7k" RESC1005X03N#1 102.7,7.7 r270 top
R48 "4.7k" RESC1005X03N#1 106.4,7.7 r270 top
R49 "33" RESC1005X03N#1 99,7.7 r270 top
R50 "33" RESC1005X03N#1 95.3,7.7 r270 top
R51 "33" RESC1005X03N#1 91.9,7.7 r270 top
R52 "1k" RESC1005X03N#1 71.7,58.3 r0 top
R53 "1k" RESC1005X03N#1 71.7,59.3 r180 top
R? "240" RESC1005X03N#1 68.9,59.1 r270 top
U1 "TI60F225C4" BGA225C65P15X15_1000X1000X100 45,59.5 r0 top
U2 "W958D8NBYA5I TR" BGA24C100P5X5_600X800X120 27.3,66.2 r0 top
U3 "W25Q64JWSSIQ" SOIC127P590X175-8N 27.3,57.9 r0 top
U4 "RTL8211F-CG" QFN40P500X500X90_HS-41N 45,32.6 r90 top
U5 "74LVC1G07W5-7" SOT95P280X145-5N 53,30 r0 top
U6 "LTM4625EY#PBF" BGA25C127P5X5_625X625X521 117.925,48.775 r270 top
U7 "LTM4625EY#PBF" BGA25C127P5X5_625X625X521 117.925,64.375 r270 top
U8 "LTM4625EY#PBF" BGA25C127P5X5_625X625X521 117.925,56.575 r270 top
U9 "LTM4625EY#PBF" BGA25C127P5X5_625X625X521 117.9,40.7 r270 top
U10 "AS4C128M8D3B-12BCN" BGA78C80P9X13_800X1050X100 64.1,59.5 r0 top
Y1 "25MHz" XTAL_3225 39.4,29.1 r90 top

## Footprints (in the part's own frame and the unit in brackets; to place one, negate y for a bottom-side part, rotate by r counter-clockwise, add the part's x,y. Pads: shape width x height; smd on the part's side, far side on the other; paste and mask are expansions set on the pad)
BGA24C100P5X5_600X800X120 [mm] "BGA, 24-Leads, Body 6.00x8.00mmx1.20mm, Pitch 1.00mm"
  round 0.35 smd mask+0.05: A2(-1,2) A3(0,2) A4(1,2) A5(2,2) B1(-2,1) B2(-1,1) B3(0,1) B4(1,1) B5(2,1) C1(-2,0) C2(-1,0) C3(0,0) C4(1,0) C5(2,0) D1(-2,-1) D2(-1,-1) D3(0,-1) D4(1,-1) D5(2,-1) E1(-2,-2) E2(-1,-2) E3(0,-2) E4(1,-2) E5(2,-2)
  silkscreen extent -3.77,-4 3,4, body extent -3,-4 3,4, height 1.2
BGA25C127P5X5_625X625X521 [mm] "BGA, 25-Leads, Body 6.25x6.25mmx5.21mm, Pitch 1.27mm"
  round 0.5 smd mask+0.05: A1(-2.54,2.54) A2(-1.27,2.54) A3(0,2.54) A4(1.27,2.54) A5(2.54,2.54) B1(-2.54,1.27) B2(-1.27,1.27) B3(0,1.27) B4(1.27,1.27) B5(2.54,1.27) C1(-2.54,0) C2(-1.27,0) C3(0,0) C4(1.27,0) C5(2.54,0) D1(-2.54,-1.27) D2(-1.27,-1.27) D3(0,-1.27) D4(1.27,-1.27) D5(2.54,-1.27) E1(-2.54,-2.54) E2(-1.27,-2.54) E3(0,-2.54) E4(1.27,-2.54) E5(2.54,-2.54)
  silkscreen extent -3.46,3.21 -3.21,3.46, body extent -3.13,-3.13 3.13,3.13, height 5.21
BGA78C80P9X13_800X1050X100 [mm] "BGA, 78-Leads, Body 8.00x10.50mmx1.00mm, Pitch 0.80mm"
  round 0.4 smd mask+0.05: A1(-3.2,4.8) A2(-2.4,4.8) A3(-1.6,4.8) A7(1.6,4.8) A8(2.4,4.8) A9(3.2,4.8) B1(-3.2,4) B2(-2.4,4) B3(-1.6,4) B7(1.6,4) B8(2.4,4) B9(3.2,4) C1(-3.2,3.2) C2(-2.4,3.2) C3(-1.6,3.2) C7(1.6,3.2) C8(2.4,3.2) C9(3.2,3.2) D1(-3.2,2.4) D2(-2.4,2.4) D3(-1.6,2.4) D7(1.6,2.4) D8(2.4,2.4) D9(3.2,2.4) E1(-3.2,1.6) E2(-2.4,1.6) E3(-1.6,1.6) E7(1.6,1.6) E8(2.4,1.6) E9(3.2,1.6) F1(-3.2,0.8) F2(-2.4,0.8) F3(-1.6,0.8) F7(1.6,0.8) F8(2.4,0.8) F9(3.2,0.8) G1(-3.2,0) G2(-2.4,0) G3(-1.6,0) G7(1.6,0) G8(2.4,0) G9(3.2,0) H1(-3.2,-0.8) H2(-2.4,-0.8) H3(-1.6,-0.8) H7(1.6,-0.8) H8(2.4,-0.8) H9(3.2,-0.8) J1(-3.2,-1.6) J2(-2.4,-1.6) J3(-1.6,-1.6) J7(1.6,-1.6) J8(2.4,-1.6) J9(3.2,-1.6) K1(-3.2,-2.4) K2(-2.4,-2.4) K3(-1.6,-2.4) K7(1.6,-2.4) K8(2.4,-2.4) K9(3.2,-2.4) L1(-3.2,-3.2) L2(-2.4,-3.2) L3(-1.6,-3.2) L7(1.6,-3.2) L8(2.4,-3.2) L9(3.2,-3.2) M1(-3.2,-4) M2(-2.4,-4) M3(-1.6,-4) M7(1.6,-4) M8(2.4,-4) M9(3.2,-4) N1(-3.2,-4.8) N2(-2.4,-4.8) N3(-1.6,-4.8) N7(1.6,-4.8) N8(2.4,-4.8) N9(3.2,-4.8)
  silkscreen extent -4.33,5.34 -4.09,5.58, body extent -4,-5.25 4,5.25, height 1
BGA225C65P15X15_1000X1000X100 [mm] "BGA, 225-Leads, Body 10.00x10.00mmx1.00mm, Pitch 0.65mm"
  round 0.35 smd mask+0.05: A1(-4.55,4.55) A2(-3.9,4.55) A3(-3.25,4.55) A4(-2.6,4.55) A5(-1.95,4.55) A6(-1.3,4.55) A7(-0.65,4.55) A8(0,4.55) A9(0.65,4.55) A10(1.3,4.55) A11(1.95,4.55) A12(2.6,4.55) A13(3.25,4.55) A14(3.9,4.55) A15(4.55,4.55) B1(-4.55,3.9) B2(-3.9,3.9) B3(-3.25,3.9) B4(-2.6,3.9) B5(-1.95,3.9) B6(-1.3,3.9) B7(-0.65,3.9) B8(0,3.9) B9(0.65,3.9) B10(1.3,3.9) B11(1.95,3.9) B12(2.6,3.9) B13(3.25,3.9) B14(3.9,3.9) B15(4.55,3.9) C1(-4.55,3.25) C2(-3.9,3.25) C3(-3.25,3.25) C4(-2.6,3.25) C5(-1.95,3.25) C6(-1.3,3.25) C7(-0.65,3.25) C8(0,3.25) C9(0.65,3.25) C10(1.3,3.25) C11(1.95,3.25) C12(2.6,3.25) C13(3.25,3.25) C14(3.9,3.25) C15(4.55,3.25) D1(-4.55,2.6) D2(-3.9,2.6) D3(-3.25,2.6) D4(-2.6,2.6) D5(-1.95,2.6) D6(-1.3,2.6) D7(-0.65,2.6) D8(0,2.6) D9(0.65,2.6) D10(1.3,2.6) D11(1.95,2.6) D12(2.6,2.6) D13(3.25,2.6) D14(3.9,2.6) D15(4.55,2.6) E1(-4.55,1.95) E2(-3.9,1.95) E3(-3.25,1.95) E4(-2.6,1.95) E5(-1.95,1.95) E6(-1.3,1.95) E7(-0.65,1.95) E8(0,1.95) E9(0.65,1.95) E10(1.3,1.95) E11(1.95,1.95) E12(2.6,1.95) E13(3.25,1.95) E14(3.9,1.95) E15(4.55,1.95) F1(-4.55,1.3) F2(-3.9,1.3) F3(-3.25,1.3) F4(-2.6,1.3) F5(-1.95,1.3) F6(-1.3,1.3) F7(-0.65,1.3) F8(0,1.3) F9(0.65,1.3) F10(1.3,1.3) F11(1.95,1.3) F12(2.6,1.3) F13(3.25,1.3) F14(3.9,1.3) F15(4.55,1.3) G1(-4.55,0.65) G2(-3.9,0.65) G3(-3.25,0.65) G4(-2.6,0.65) G5(-1.95,0.65) G6(-1.3,0.65) G7(-0.65,0.65) G8(0,0.65) G9(0.65,0.65) G10(1.3,0.65) G11(1.95,0.65) G12(2.6,0.65) G13(3.25,0.65) G14(3.9,0.65) G15(4.55,0.65) H1(-4.55,0) H2(-3.9,0) H3(-3.25,0) H4(-2.6,0) H5(-1.95,0) H6(-1.3,0) H7(-0.65,0) H8(0,0) H9(0.65,0) H10(1.3,0) H11(1.95,0) H12(2.6,0) H13(3.25,0) H14(3.9,0) H15(4.55,0) J1(-4.55,-0.65) J2(-3.9,-0.65) J3(-3.25,-0.65) J4(-2.6,-0.65) J5(-1.95,-0.65) J6(-1.3,-0.65) J7(-0.65,-0.65) J8(0,-0.65) J9(0.65,-0.65) J10(1.3,-0.65) J11(1.95,-0.65) J12(2.6,-0.65) J13(3.25,-0.65) J14(3.9,-0.65) J15(4.55,-0.65) K1(-4.55,-1.3) K2(-3.9,-1.3) K3(-3.25,-1.3) K4(-2.6,-1.3) K5(-1.95,-1.3) K6(-1.3,-1.3) K7(-0.65,-1.3) K8(0,-1.3) K9(0.65,-1.3) K10(1.3,-1.3) K11(1.95,-1.3) K12(2.6,-1.3) K13(3.25,-1.3) K14(3.9,-1.3) K15(4.55,-1.3) L1(-4.55,-1.95) L2(-3.9,-1.95) L3(-3.25,-1.95) L4(-2.6,-1.95) L5(-1.95,-1.95) L6(-1.3,-1.95) L7(-0.65,-1.95) L8(0,-1.95) L9(0.65,-1.95) L10(1.3,-1.95) L11(1.95,-1.95) L12(2.6,-1.95) L13(3.25,-1.95) L14(3.9,-1.95) L15(4.55,-1.95) M1(-4.55,-2.6) M2(-3.9,-2.6) M3(-3.25,-2.6) M4(-2.6,-2.6) M5(-1.95,-2.6) M6(-1.3,-2.6) M7(-0.65,-2.6) M8(0,-2.6) M9(0.65,-2.6) M10(1.3,-2.6) M11(1.95,-2.6) M12(2.6,-2.6) M13(3.25,-2.6) M14(3.9,-2.6) M15(4.55,-2.6) N1(-4.55,-3.25) N2(-3.9,-3.25) N3(-3.25,-3.25) N4(-2.6,-3.25) N5(-1.95,-3.25) N6(-1.3,-3.25) N7(-0.65,-3.25) N8(0,-3.25) N9(0.65,-3.25) N10(1.3,-3.25) N11(1.95,-3.25) N12(2.6,-3.25) N13(3.25,-3.25) N14(3.9,-3.25) N15(4.55,-3.25) P1(-4.55,-3.9) P2(-3.9,-3.9) P3(-3.25,-3.9) P4(-2.6,-3.9) P5(-1.95,-3.9) P6(-1.3,-3.9) P7(-0.65,-3.9) P8(0,-3.9) P9(0.65,-3.9) P10(1.3,-3.9) P11(1.95,-3.9) P12(2.6,-3.9) P13(3.25,-3.9) P14(3.9,-3.9) P15(4.55,-3.9) R1(-4.55,-4.55) R2(-3.9,-4.55) R3(-3.25,-4.55) R4(-2.6,-4.55) R5(-1.95,-4.55) R6(-1.3,-4.55) R7(-0.65,-4.55) R8(0,-4.55) R9(0.65,-4.55) R10(1.3,-4.55) R11(1.95,-4.55) R12(2.6,-4.55) R13(3.25,-4.55) R14(3.9,-4.55) R15(4.55,-4.55)
  silkscreen extent -5.77,-5 5,5, body extent -5,-5 5,5, height 1
CAPC1005X06N#1 [mm] "Chip Capacitor, 2-Leads, Body 1,00x0,50mm, IPC Medium Density"
  rrect50% 0.55x0.5 smd mask+0.05: 1(-0.475,0) 2(0.475,0)
  body extent -0.55,-0.3 0.55,0.3, height 0.6
CAPC1005X06N#2 [mm] "Chip Capacitor, 2-Leads, Body 1,00x0,50mm, IPC Medium Density"
  rrect50% 0.55x0.5 smd: 1(-0.475,0) 2(0.475,0)
  body extent -0.55,-0.3 0.55,0.3, height 0.6
CAPC2012X14N [mm] "Chip Capacitor, 2-Leads, Body 2,00x1,25mm, IPC Medium Density"
  rrect50% 1x1.4 smd paste-0.025 mask+0.05: 1(-0.9,0) 2(0.9,0)
  body extent -1.05,-0.67 1.05,0.67, height 1.35
INDC1005X05N#1 [mm] "Chip Inductor, 2-Leads, Body 1.00x0.50mm, IPC Medium Density"
  rrect50% 0.6x0.55 smd: 1(-0.5,0) 2(0.5,0)
  body extent -0.5,-0.25 0.5,0.25, height 0.5
INDC1005X05N#2 [mm] "Chip Inductor, 2-Leads, Body 1.00x0.50mm, IPC Medium Density"
  rrect50% 0.6x0.55 smd mask+0.05: 1(-0.5,0) 2(0.5,0)
  body extent -0.5,-0.25 0.5,0.25, height 0.5
INDC2520X12N [mm] "Chip Inductor, 2-Leads, Body 2.50x2.00mm, IPC Medium Density"
  rrect25% 1.1x2.14 smd mask+0.05: 1(-1.13,0) 2(1.13,0)
  body extent -1.25,-1 1.25,1, height 1.2
PULSE_J0G-0003NL [mm]
  round 0 hole 3.2 unplated mask+0.1: 0(-4.826,-1.016) 0(4.826,-1.016)
  round 1.5 hole 0.89 mask+0.05: 1(-5.08,-7.62) 2(-3.048,-7.62) 3(-1.016,-7.62) 4(1.016,-7.62) 5(3.048,-7.62) 6(5.08,-7.62) 7(-6.096,-10.16) 8(-4.064,-10.16) 9(-2.032,-10.16) 10(2.032,-10.16) 11(4.064,-10.16) 12(6.096,-10.16)
  round 2 hole 1.27 mask+0.05: 13(-7.518,5.334) 14(-7.518,7.874) 15(7.518,2.794) 16(7.518,5.334) 17(7.518,7.874)
  round 2.2 hole 1.57 mask+0.1: MH0(-8.788,-1.016) MH1(8.788,-1.016)
  Keep-Out Layer circle w0.2: c-4.826,-1.016 r1.798
  Keep-Out Layer circle w0.2: c4.826,-1.016 r1.798
  silkscreen extent -9,-11.9 9,6.6, body extent -9.02,-11.94 9.02,12.62, height 11.35
QFN40P500X500X90_HS-41N [mm] "QFN, 40-Leads, Body 5.00x5.00mm, Pitch 0.40mm, Thermal Pad 3.70x3.70mm, IPC Medium Density"
  rrect50% 0.6x0.2 smd mask+0.05: 1(-2.425,1.8) 2(-2.425,1.4) 3(-2.425,1) 4(-2.425,0.6) 5(-2.425,0.2) 6(-2.425,-0.2) 7(-2.425,-0.6) 8(-2.425,-1) 9(-2.425,-1.4) 10(-2.425,-1.8) 21(2.425,-1.8) 22(2.425,-1.4) 23(2.425,-1) 24(2.425,-0.6) 25(2.425,-0.2) 26(2.425,0.2) 27(2.425,0.6) 28(2.425,1) 29(2.425,1.4) 30(2.425,1.8)
  rrect50% 0.2x0.6 smd mask+0.05: 11(-1.8,-2.425) 12(-1.4,-2.425) 13(-1,-2.425) 14(-0.6,-2.425) 15(-0.2,-2.425) 16(0.2,-2.425) 17(0.6,-2.425) 18(1,-2.425) 19(1.4,-2.425) 20(1.8,-2.425) 31(1.8,2.425) 32(1.4,2.425) 33(1,2.425) 34(0.6,2.425) 35(0.2,2.425) 36(-0.2,2.425) 37(-0.6,2.425) 38(-1,2.425) 39(-1.4,2.425) 40(-1.8,2.425)
  rect 3.7x3.7 smd paste-10 mask+0.05: 41(0,0)
  silkscreen extent -2.82,-2.65 2.65,2.82, body extent -2.5,-2.5 2.5,2.5, height 0.9
RESC1005X03N#1 [mm] "Chip Resistor, 2-Leads, Body 1,00x0,50mm, IPC Medium Density"
  rrect50% 0.6x0.55 smd mask+0.05: 1(-0.5,0) 2(0.5,0)
  body extent -0.52,-0.28 0.53,0.27, height 0.3
RESC1005X03N#2 [mm] "Chip Resistor, 2-Leads, Body 1,00x0,50mm, IPC Medium Density"
  rrect50% 0.6x0.55 smd: 1(-0.5,0) 2(0.5,0)
  body extent -0.52,-0.28 0.52,0.27, height 0.3
SOIC127P590X175-8N [mm] "SOIC, 8-Leads, Body 4,85x3,85mm, Pitch 1,27mm, IPC Medium Density"
  rrect50% 1.45x0.6 smd paste-0.025 mask+0.05: 1(-2.675,1.905) 2(-2.675,0.635) 3(-2.675,-0.635) 4(-2.675,-1.905) 5(2.675,-1.905) 6(2.675,-0.635) 7(2.675,0.635) 8(2.675,1.905)
  silkscreen extent -3.62,-2.45 1.55,2.62, body extent -2.95,-2.45 2.95,2.45, height 1.75
SOT95P280X145-5N [mm] "SOT23, 5-Leads, Body 2,95x2,80mm, Pitch 0,95mm, IPC Medium Density"
  rrect50% 1.05x0.6 smd paste-0.025 mask+0.05: 1(-1.325,0.95) 2(-1.325,0) 3(-1.325,-0.95) 4(1.325,-0.95) 5(1.325,0.95)
  silkscreen extent -0.4,-1.5 0.4,1.5, body extent -1.4,-1.48 1.4,1.48, height 1.45
XTAL_3225 [mm]
  rrect50% 1.4x1.15 smd paste-0.025 mask+0.05: 1(-1.1,-0.8) 2(1.1,-0.8) 3(1.1,0.8) 4(-1.1,0.8)
  body extent -1.6,-1.25 1.6,1.25, height 1.2

## Part data
C1 C2 C3 C4 C5 C6 C7 C8 C9 C10 C11 C12 C13 C14 C15 C16 C17 C18 C19 C20 C21 C22 C23 C24 C30 C33 C34 C39 C43 C44 C45 C46 C47 C48 C49 C53 C57 C61 C65 C66 C67 C68 C69 C70 C71 C72 C73 C74 C75 C76 C77 C78 C79 C80 C81 C82 C83: library part GRM155R60J106ME47D, "CAP CER 10UF 6.3V X5R 0402", Manufacturer 1="Murata Electronics", Supplier Part Number 1=490-13239-1-ND, TempC=X5R, Voltage=6.3V, Manufacturer Part Number 1=GRM155R60J106ME47D, Part Number=GRM155R60J106ME47D, Supplier 1=Digi-Key, Tol=20%
C25 C29 C31 C32 C35 C36 C37 C38 C40 C52 C56 C60 C64: library part GRM155R71E104KE14J, "CAP CER 0.1UF 25V X7R 0402", Manufacturer 1="Murata Electronics", Supplier Part Number 1=490-14603-1-ND, TempC=X7R, Voltage=25V, Manufacturer Part Number 1=GRM155R71E104KE14J, Part Number=GRM155R71E104KE14J, Supplier 1=Digi-Key, Tol=10%
C26 C27 C28: library part GCM1555C1H101FA16J, "CAP CER 100PF 50V C0G/NP0 0402", Manufacturer 1="Murata Electronics", Supplier Part Number 1=490-GCM1555C1H101FA16JTR-ND, TempC=C0G/NP0, Voltage=50V, Manufacturer Part Number 1=GCM1555C1H101FA16J, Part Number=GCM1555C1H101FA16J, Supplier 1=Digi-Key, Tol=1%
C41 C42: library part CC0402JRNPO9BN270, "CAP CER 27PF 50V C0G/NPO 0402", Manufacturer 1=Yageo, Supplier Part Number 1=311-1019-1-ND, TempC=C0G/NP0, Voltage=50V, Manufacturer Part Number 1=CC0402JRNPO9BN270, Part Number=CC0402JRNPO9BN270, Supplier 1=Digi-Key, Tol=5%
C50 C54 C58 C62: library part GRM21BR61E226ME44L, "CAP CER 22UF 25V X5R 0805", Manufacturer 1="Murata Electronics", Supplier Part Number 1=490-10749-1-ND, TempC=X5R, Voltage=25V, Manufacturer Part Number 1=GRM21BR61E226ME44L, Part Number=GRM21BR61E226ME44L, Supplier 1=Digi-Key, Tol=20%
C51 C55 C59 C63: library part GRM21BR61A476ME15L, "CAP CER 47UF 10V X5R 0805", Manufacturer 1="Murata Electronics", Supplier Part Number 1=490-9961-1-ND, TempC=X5R, Voltage=10V, Manufacturer Part Number 1=GRM21BR61A476ME15L, Part Number=GRM21BR61A476ME15L, Supplier 1=Digi-Key, Tol=20%
FB1 FB2 FB3 FB4 FB5 FB6: library part BLM15PD121SN1D, "FERRITE BEAD 120 OHM 0402 1LN", Manufacturer 1="Murata Electronics", Supplier Part Number 1=490-5203-1-ND, DCR=90mOhm, Ir=1.3A, Manufacturer Part Number 1=BLM15PD121SN1D, Part Number=BLM15PD121SN1D, Supplier 1=Digi-Key
J1: "CONN JACK 1PORT 1000 BASE-T PCB", Manufacturer 1="Pulse Electronics Network", Supplier Part Number 1=553-1852-ND, Manufacturer Part Number 1=J0G-0003NL, Part Number=J0G-0003NL, Supplier 1=Digi-Key
L1: library part LQM2HPN2R2MJ0L, "FIXED IND 2.2UH 1A 150 MOHM SMD", Manufacturer 1="Murata Electronics", Supplier Part Number 1=490-6700-1-ND, DCR=150mOhm, Ir="1 A", Manufacturer Part Number 1=LQM2HPN2R2MJ0L, Part Number=LQM2HPN2R2MJ0L, Supplier 1=Digi-Key
R1 R2 R3 R4 R5 R6 R7 R8: library part RT0402BRD0710KL, "RES SMD 10K OHM 0.1% 1/16W 0402", Manufacturer 1=Yageo, Supplier Part Number 1=YAG1346CT-ND, Manufacturer Part Number 1=RT0402BRD0710KL, Part Number=RT0402BRD0710KL, Supplier 1=Digi-Key, Tol=0.1%
R9 R11 R17 R18 R19 R20 R21 R22 R23 R33 R39 R49 R50 R51: library part RC0402FR-0733RL, "RES SMD 33 OHM 1% 1/16W 0402", Manufacturer 1=Yageo, Supplier Part Number 1=311-33.0LRCT-ND, Manufacturer Part Number 1=RC0402FR-0733RL, Part Number=RC0402FR-0733RL, Supplier 1=Digi-Key, Tol=1%
R10 R13 R14 R15 R16: library part RC0402FR-0747KL, "RES SMD 47K OHM 1% 1/16W 0402", Manufacturer 1=Yageo, Supplier Part Number 1=311-47.0KLRCT-ND, Manufacturer Part Number 1=RC0402FR-0747KL, Part Number=RC0402FR-0747KL, Supplier 1=Digi-Key, Tol=1%
R12 R52 R53: library part RC0402FR-071KL, "RES SMD 1K OHM 1% 1/16W 0402", Manufacturer 1=Yageo, Supplier Part Number 1=311-1.00KLRCT-ND, Manufacturer Part Number 1=RC0402FR-071KL, Part Number=RC0402FR-071KL, Supplier 1=Digi-Key, Tol=1%
R24 R25 R26 R27 R28 R29 R30 R31 R32 R40 R42 R47 R48: library part RC0402FR-074K7L, "RES SMD 4.7K OHM 1% 1/16W 0402", Manufacturer 1=Yageo, Supplier Part Number 1=311-4.7KLRCT-ND, Manufacturer Part Number 1=RC0402FR-074K7L, Part Number=RC0402FR-074K7L, Supplier 1=Digi-Key, Tol=1%
R34: library part RC0402FR-070RL, "RES SMD 0 OHM JUMPER 1/16W 0402", Manufacturer 1=Yageo, Supplier Part Number 1=311-0.0LRCT-ND, Manufacturer Part Number 1=RC0402FR-070RL, Part Number=RC0402FR-070RL, Supplier 1=Digi-Key, Tol=1%
R35 R36 R37 R43 R44 R45 R46: library part RC0402JR-07510RL, "RES 510 OHM 5% 1/16W 0402", Manufacturer 1=Yageo, Supplier Part Number 1=311-510JRCT-ND, Manufacturer Part Number 1=RC0402JR-07510RL, Part Number=RC0402JR-07510RL, Supplier 1=Digi-Key, Tol=1%
R38: library part RC0402FR-072K49L, "RES SMD 2.49K OHM 1% 1/16W 0402", Manufacturer 1=Yageo, Supplier Part Number 1=311-2.49KLRCT-ND, Manufacturer Part Number 1=RC0402FR-072K49L, Part Number=RC0402FR-072K49L, Supplier 1=Digi-Key, Tol=1%
R41: library part RC0402FR-071K5L, "RES 1.5K OHM 1% 1/16W 0402", Manufacturer 1=Yageo, Supplier Part Number 1=311-1.50KLRCT-ND, Manufacturer Part Number 1=RC0402FR-071K5L, Part Number=RC0402FR-071K5L, Supplier 1=Digi-Key, Tol=1%
R?: library part RC0402FR-07240RL, "RES SMD 240 OHM 1% 1/16W 0402", Manufacturer 1=Yageo, Supplier Part Number 1=311-240LRCT-ND, Manufacturer Part Number 1=RC0402FR-07240RL, Part Number=RC0402FR-07240RL, Supplier 1=Digi-Key, Tol=1%
U1: "FPGA TITAN 140HSIO 4PLL 225BGA", Manufacturer 1="Efinix, Inc.", Supplier Part Number 1=2134-TI60F225C4-ND, Manufacturer Part Number 1=TI60F225C4, Part Number=TI60F225C4, Supplier 1=Digi-Key
U2: "256MB HYPERRAM X8, 200MHZ, IND T", Manufacturer 1="Winbond Electronics", Supplier Part Number 1=256-W958D8NBYA5ITRCT-ND, Manufacturer Part Number 1="W958D8NBYA5I TR", Part Number="W958D8NBYA5I TR", Supplier 1=Digi-Key
U3: "IC FLASH 64MBIT SPI/QUAD 8SOIC", Manufacturer 1="Winbond Electronics", Supplier Part Number 1=256-W25Q64JWSSIQ-ND, Manufacturer Part Number 1=W25Q64JWSSIQ, Part Number=W25Q64JWSSIQ, Supplier 1=Digi-Key
U4: "Phy 1-CH 10MBPS/100MBPS/1GBPS 3.3V 40-PIN QFN Ep", Manufacturer 1=Realtek, Manufacturer Part Number 1=RTL8211F-CG, Part Number=RTL8211F-CG
U5: "IC BUFFER NON-INVERT 5.5V SOT25", Manufacturer 1="Diodes Incorporated", Supplier Part Number 1=74LVC1G07W5-7DICT-ND, Manufacturer Part Number 1=74LVC1G07W5-7, Part Number=74LVC1G07W5-7, Supplier 1=Digi-Key
U6 U7 U8 U9: "DC DC CONVERTER 0.6-5.5V", Manufacturer 1="Analog Devices Inc.", Supplier Part Number 1=505-LTM4625EY#PBF-ND, Manufacturer Part Number 1=LTM4625EY#PBF, Part Number=LTM4625EY#PBF, Supplier 1=Digi-Key
U10: "IC DRAM 1GBIT PARALLEL 78FBGA", Manufacturer 1="Alliance Memory, Inc.", Supplier Part Number 1=1450-1447-ND, Manufacturer Part Number 1=AS4C128M8D3B-12BCN, Part Number=AS4C128M8D3B-12BCN, Supplier 1=Digi-Key
Y1: library part "TSX-3225 25.0000MF10P-C0", "CRYSTAL 25.0000MHZ 18PF SMD", Manufacturer 1=EPSON, Supplier Part Number 1=SER4211TR-ND, Manufacturer Part Number 1="TSX-3225 25.0000MF10P-C0", Part Number="TSX-3225 25.0000MF10P-C0", Supplier 1=Digi-Key

## Via types
v1: diameter 0.4, hole 0.2, Top Layer to Bottom Layer, tented both sides, 159 vias
v2: diameter 0.35/0.15/0.35 (per signal layer), hole 0.15, Top Layer to Bottom Layer, tented both sides, 91 vias
v3: diameter 0.35, hole 0.15, Top Layer to Bottom Layer, tented both sides, 46 vias
v4: diameter 0.4/0.2/0.4 (per signal layer), hole 0.2, Top Layer to Bottom Layer, tented both sides, 27 vias
v5: diameter 0.5, hole 0.2, Top Layer to Bottom Layer, 9 vias

## Nets (pads, with @x,y where several pads share a name; then routed paths per layer and width w, separated by ;. In a path a pad name is that pad's centre, name@x,y a point inside that pad or via, vN(x,y) a via of type N, cw(c..) or ccw(c..) an arc to the next point about the centre after c; other vN are vias at no path point)
B1A_DP0_N: U1.R2 | length 2.7
  Top Layer w0.111: 39.111,53.939 40.6,53.939 41.013,54.352 U1.R2@41.1,54.95
B1A_DP0_P: U1.P2 | length 3.1
  Top Layer w0.089: 40.775,54.65 40.775,55.275 U1.P2@41.1,55.6
  Top Layer w0.111: 39.111,54.177 40.502,54.177 40.775,54.45 40.775,54.65
B1A_DP2_N: U1.M2 | length 3.6
  Top Layer w0.2: v2(40.775,56.575) U1.M2@41.1,56.9
  Bottom Layer w0.089: 40,55.875 40.25,55.975 v2(40.775,56.575)
  Bottom Layer w0.094: 37.975,55.706 39.169,55.706 40,55.875
B1A_DP2_P: U1.N2 | length 3.3
  Top Layer w0.2: v2(40.775,55.925) U1.N2@41.1,56.25
  Bottom Layer w0.08: 40.075,55.664 v2(40.775,55.925)
  Bottom Layer w0.094: 37.975,55.485 39.26,55.485 40.075,55.664
B1A_DP4_N: U1.H4 | length 4.1
  Top Layer w0.2: v3(42.075,59.175) U1.H4@42.4,59.5
  IN2 w0.089: 40.75,58.876 41.075,58.85 41.675,58.875 v3(42.075,59.175)
  IN2 w0.094: 38.55,59.028 40.322,59.028 40.75,58.876
B1A_DP4_P: U1.H5 | length 4.7
  Top Layer w0.2: v3(42.725,59.175) U1.H5@43.05,59.5
  IN2 w0.089: 40.775,59.422 41.575,59.475 42.125,59.475 42.475,59.375 v3(42.725,59.175)
  IN2 w0.094: 38.55,59.272 40.322,59.272 40.775,59.422
B1A_DP5_N: U1.J3 | length 2.8
  Top Layer w0.2: v2(41.425,58.525) U1.J3@41.75,58.85
  Bottom Layer w0.111: 39.175,58.85 40.481,58.85 v2(41.425,58.525)
B1A_DP5_P: U1.K4 | length 3.6
  Top Layer w0.2: v2(42.075,57.875) U1.K4@42.4,58.2
  Bottom Layer w0.089: 41.225,58.2 41.75,58.2 v2(42.075,57.875)
  Bottom Layer w0.111: 39.175,58.612 40.383,58.612 41.225,58.2
B1A_DP6_N: U1.K2 | length 2.1
  Top Layer w0.2: v2(40.775,57.875) U1.K2@41.1,58.2
  Bottom Layer w0.111: 39.175,58.194 40.206,58.194 v2(40.775,57.875)
B1A_DP6_P: U1.K3 | length 3
  Top Layer w0.2: v2(41.425,57.875) U1.K3@41.75,58.2
  Bottom Layer w0.089: 40.6,57.55 41.1,57.55 v2(41.425,57.875)
  Bottom Layer w0.111: 39.175,57.956 40.069,57.956 40.35,57.725 40.6,57.55
B1A_DP7_N: U1.J1 | length 1.3
  Top Layer w0.111: 39.2,58.644 40.244,58.644 U1.J1@40.45,58.85
B1A_DP7_P: U1.K1 | length 1.3
  Top Layer w0.111: 39.2,58.406 40.244,58.406 U1.K1@40.45,58.2
B1A_DP8_N: U1.H3 | length 2.8
  Top Layer w0.2: v2(41.425,59.175) U1.H3@41.75,59.5
  Bottom Layer w0.089: 40.675,59.5 41.1,59.5 v2(41.425,59.175)
  Bottom Layer w0.111: 39.175,59.456 40.431,59.456 40.675,59.5
B1A_DP8_P: U1.J2 | length 2.1
  Top Layer w0.2: v2(40.775,59.175) U1.J2@41.1,58.85
  Bottom Layer w0.111: 39.175,59.219 40.431,59.219 v2(40.775,59.175)
B1B_DP2_N: U1.F5 | length 4.7
  Top Layer w0.2: v3(42.725,61.125) U1.F5@43.05,60.8
  IN2 w0.089: 41.025,61.425 41.825,61.45 42.2,61.45 42.475,61.325 v3(42.725,61.125)
  IN2 w0.094: 38.575,61.335 40.625,61.325 41.025,61.425
B1B_DP2_P: U1.G5 | length 5
  Top Layer w0.2: v3(42.725,59.825) U1.G5@43.05,60.15
  IN2 w0.089: 40.975,61 42.275,60.35 v3(42.725,59.825)
  IN2 w0.094: 38.575,61.091 40.625,61.1 40.975,61
B1B_DP3_N: U1.G4 | length 4.3
  Top Layer w0.2: v3(42.075,59.825) U1.G4@42.4,60.15
  IN2 w0.094: 38.55,60.56 40.21,60.56 40.775,60.75 41.125,60.625 v3(42.075,59.825)
B1B_DP3_P: U1.G3 | length 3.4
  Top Layer w0.2: v3(41.425,59.825) U1.G3@41.75,60.15
  IN2 w0.089: 40.95,60.125 v3(41.425,59.825)
  IN2 w0.094: 38.55,60.316 40.21,60.316 40.95,60.125
B1B_DP8_N: U1.C2
B1B_DP9_N: U1.A2 | length 1.3
  Top Layer w0.111: U1.A2@41.1,64.05 41.144,64.594 41.144,65.325
B1B_DP9_P: U1.B2 | length 2.1
  Top Layer w0.089: U1.B2@41.1,63.4 41.425,63.725 41.425,64.35
  Top Layer w0.111: 41.381,65.325 41.381,64.594 41.425,64.35
B2A_DP0_N: U1.D5 | length 3.9
  Top Layer w0.2: U1.D5@43.05,62.1 v2(43.375,62.425)
  Bottom Layer w0.089: v2(43.375,62.425) 43.375,64.025
  Bottom Layer w0.111: 43.375,64.025 43.419,64.269 43.419,65.9
B2A_DP0_P: U1.E6 | length 4.7
  Top Layer w0.2: v2(43.375,61.775) U1.E6@43.7,61.45
  Bottom Layer w0.089: v2(43.375,61.775) 43.7,62.1 43.7,64.025
  Bottom Layer w0.111: 43.656,65.9 43.656,64.269 43.7,64.025
B2A_DP1_N: U1.C6 | length 3.2
  Top Layer w0.2: U1.C6@43.7,62.75 v2(44.025,63.075)
  Bottom Layer w0.089: v2(44.025,63.075) 44.35,63.4 44.35,64.025
  Bottom Layer w0.111: 44.306,65.65 44.306,64.269 44.35,64.025
B2A_DP1_P: U1.B6 | length 2.4
  Top Layer w0.2: U1.B6@43.7,63.4 v2(44.025,63.725)
  Bottom Layer w0.111: v2(44.025,63.725) 44.069,64.269 44.069,65.65
B2A_DP3_N: U1.A6 | length 2.7
  Top Layer w0.111: 43.494,66.627 43.494,64.256 U1.A6@43.7,64.05
B2A_DP3_P: U1.A5 | length 2.7
  Top Layer w0.111: U1.A5@43.05,64.05 43.256,64.256 43.256,66.627
B2A_DP4_N: U1.F8 | length 4.2
  Top Layer w0.2: v3(44.675,61.125) U1.F8@45,60.8
  IN2 w0.089: 44.35,63.675 44.35,63.05 44.35,61.8 v3(44.675,61.125)
  IN2 w0.094: 44.147,64.725 44.147,64.053 44.35,63.675
B2A_DP4_P: U1.F7 | length 4.2
  Top Layer w0.2: v3(44.025,61.125) U1.F7@44.35,60.8
  IN2 w0.089: 43.7,63.675 43.7,63.05 43.7,61.8 v3(44.025,61.125)
  IN2 w0.094: 43.7,63.675 43.903,64.053 43.903,64.725
B2A_DP6_N: U1.A7 | length 2.7
  Top Layer w0.111: 44.05,66.625 44.05,65.269 44.394,64.594 U1.A7@44.35,64.05
B2A_DP6_P: U1.B7 | length 3.4
  Top Layer w0.089: U1.B7@44.35,63.4 44.675,63.725 44.675,64.225
  Top Layer w0.111: 44.288,66.625 44.288,65.367 44.625,64.7 44.675,64.225
B2A_DP7_N: U1.A8 | length 2.6
  Top Layer w0.111: U1.A8@45,64.05 45.025,64.65 45.325,65.387 45.325,66.625
B2A_DP7_P: U1.B8 | length 3.4
  Top Layer w0.089: U1.B8@45,63.4 45.325,63.725 45.325,64.225
  Top Layer w0.111: 45.325,64.225 45.281,64.594 45.563,65.288 45.563,66.625
B2B_DP0_N: U1.D8 | length 3
  Top Layer w0.2: U1.D8@45,62.1 v3(45.325,62.425)
  IN2 w0.089: v3(45.325,62.425) 45.65,62.75 45.65,63.425 45.447,63.628
  IN2 w0.094: 45.447,63.628 45.447,64.75
B2B_DP0_P: U1.E8 | length 3.7
  Top Layer w0.2: U1.E8@45,61.45 v3(45.325,61.775)
  IN2 w0.089: 45.203,63.628 45,63.425 45,62.1 v3(45.325,61.775)
  IN2 w0.094: 45.203,63.628 45.203,64.75
B2B_DP1_N: U1.C9 | length 3.3
  Top Layer w0.2: U1.C9@45.65,62.75 v2(45.975,63.075)
  Bottom Layer w0.111: 45.769,65.825 45.769,63.281 v2(45.975,63.075)
B2B_DP1_P: U1.C8 | length 3.3
  Top Layer w0.2: U1.C8@45,62.75 v2(45.325,63.075)
  Bottom Layer w0.111: v2(45.325,63.075) 45.531,63.281 45.531,65.825
B2B_DP2_N: U1.A9 | length 2.6
  Top Layer w0.111: U1.A9@45.65,64.05 45.675,64.7 45.925,65.236 45.925,66.625
B2B_DP2_P: U1.B9 | length 3.4
  Top Layer w0.089: U1.B9@45.65,63.4 45.975,63.725 45.975,64.225
  Top Layer w0.111: 45.975,64.225 45.931,64.594 46.163,65.138 46.163,66.625